# EAGLE board SparkFun GPS RTK Surveyor-Panel (EAGLE 9.6.2), part 1 of 3
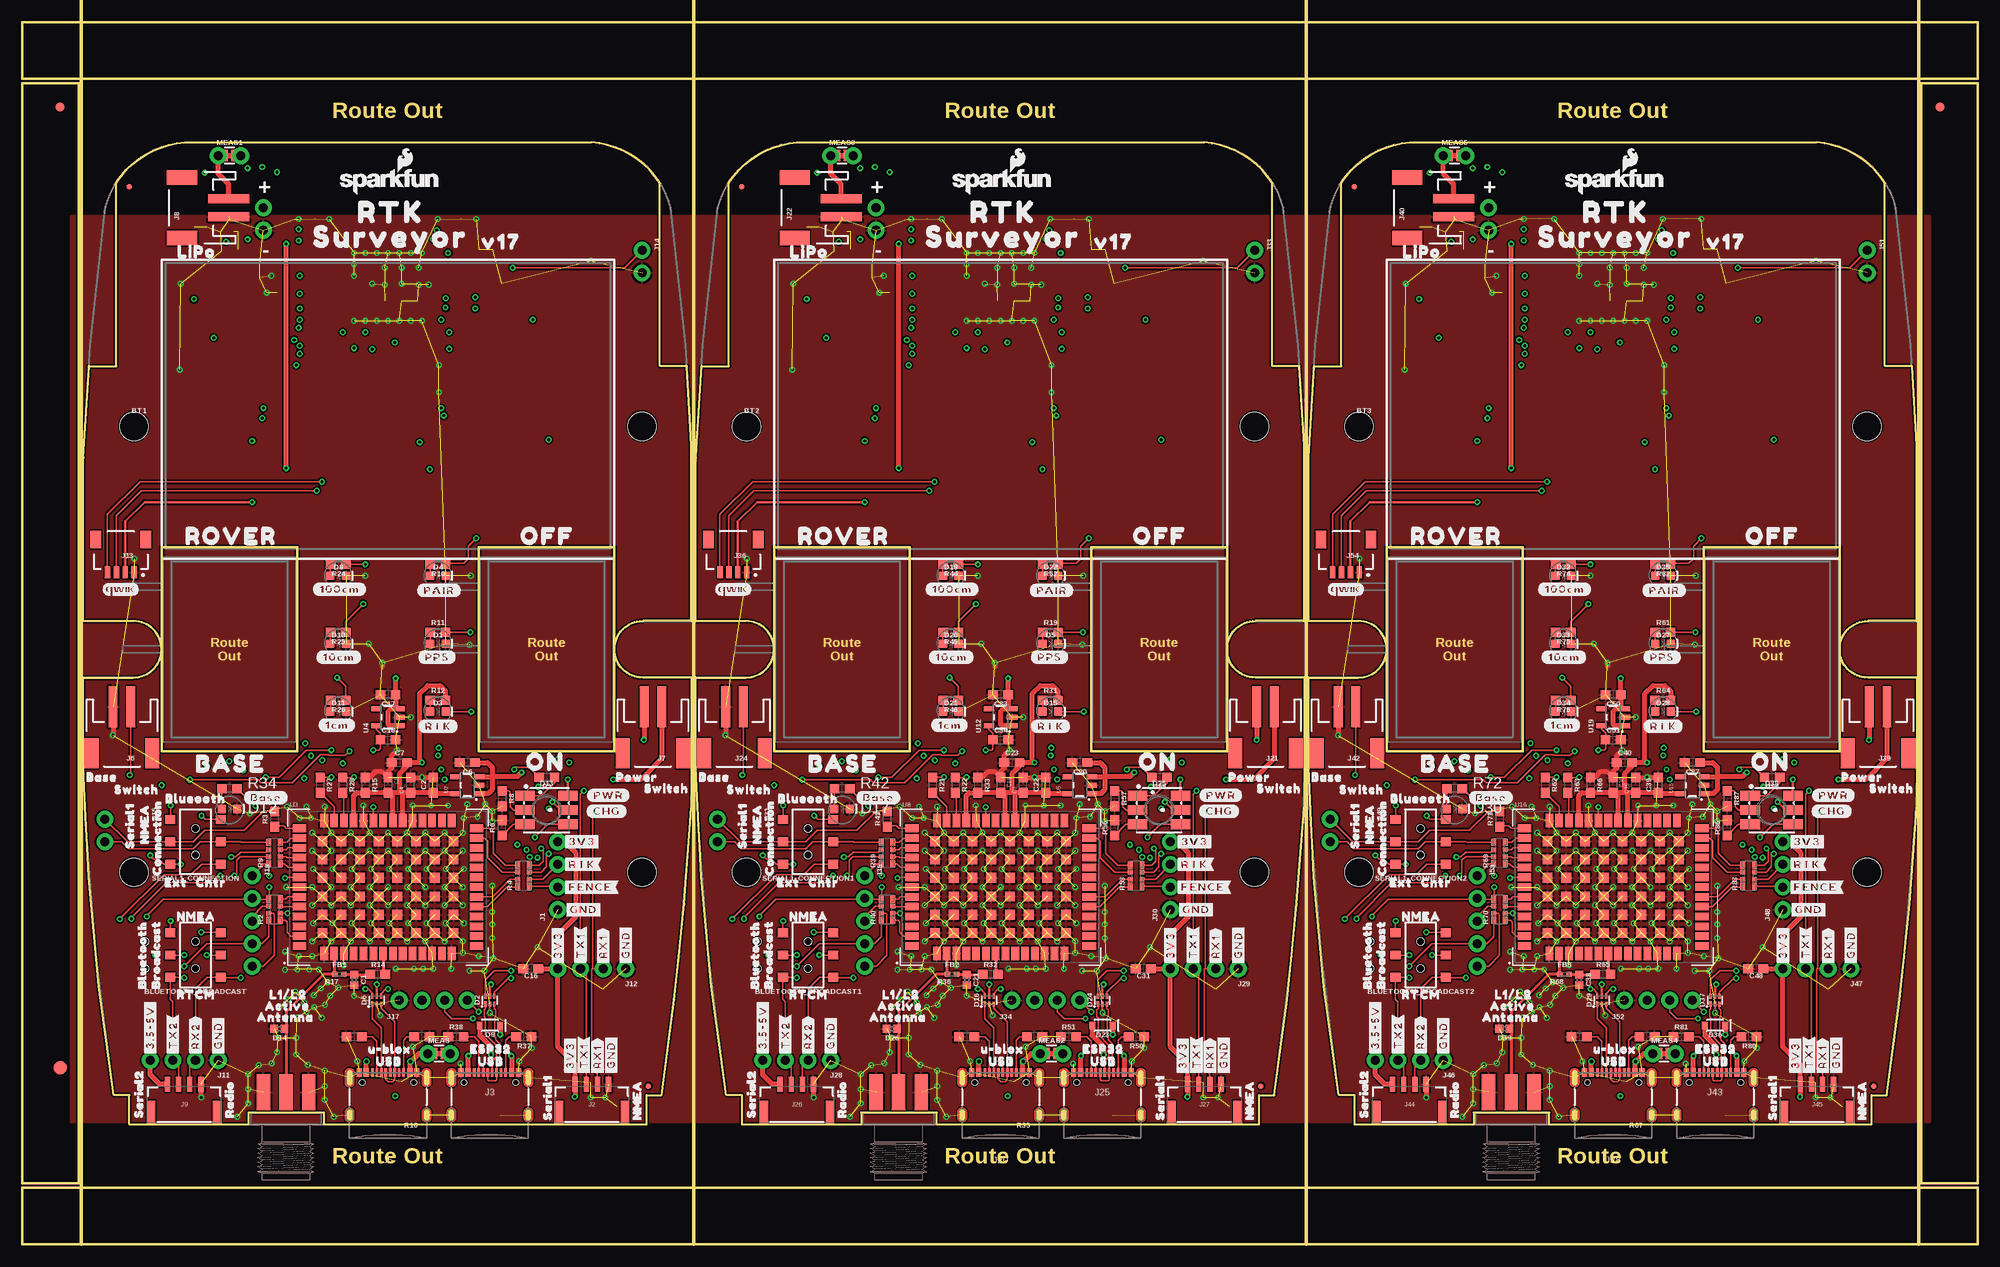
[diagram p0: board, top side]
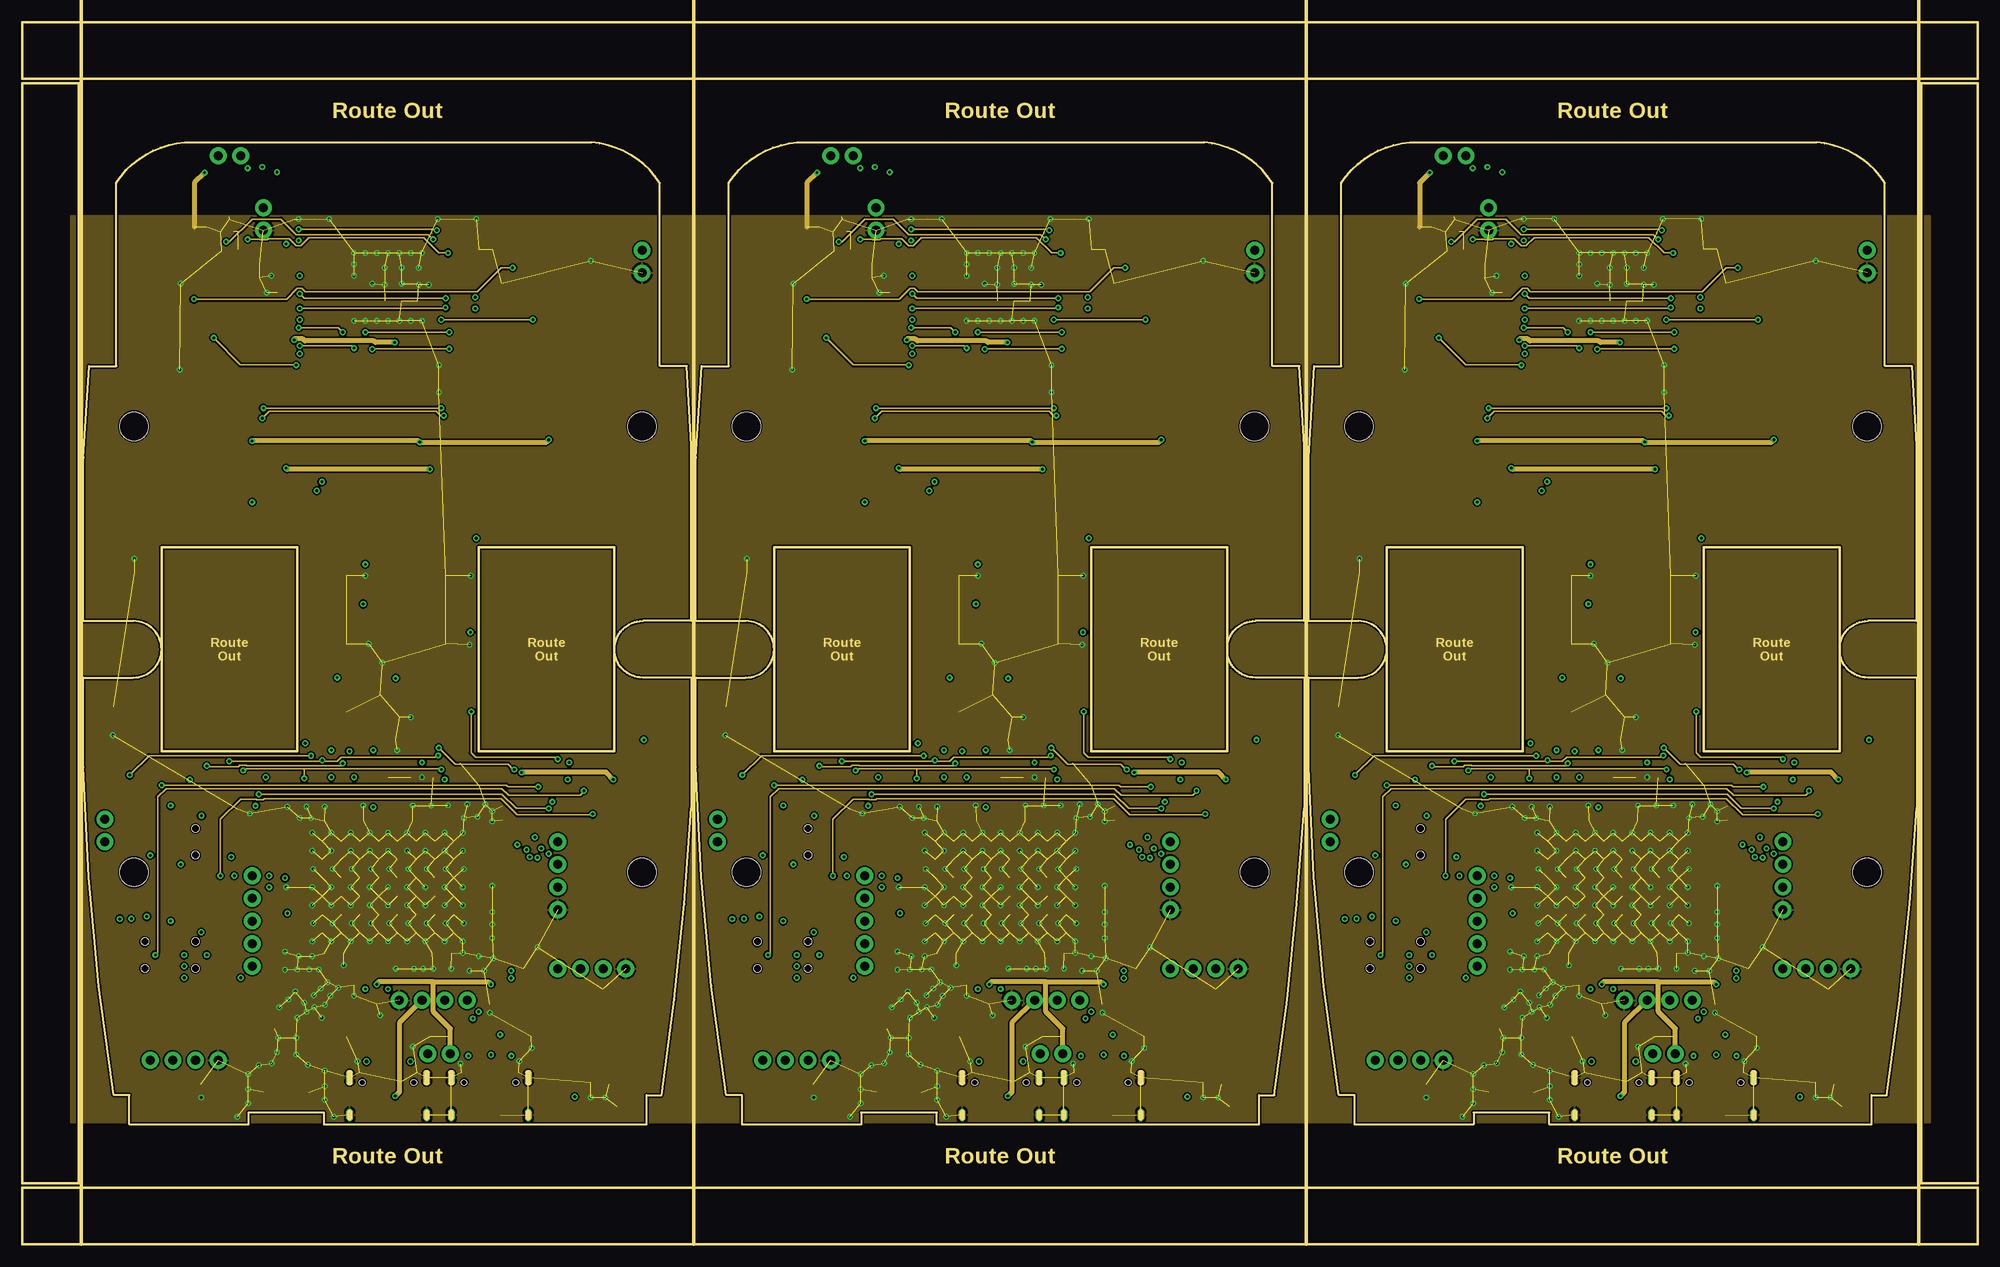
[diagram p1: board, inner layer Route2]
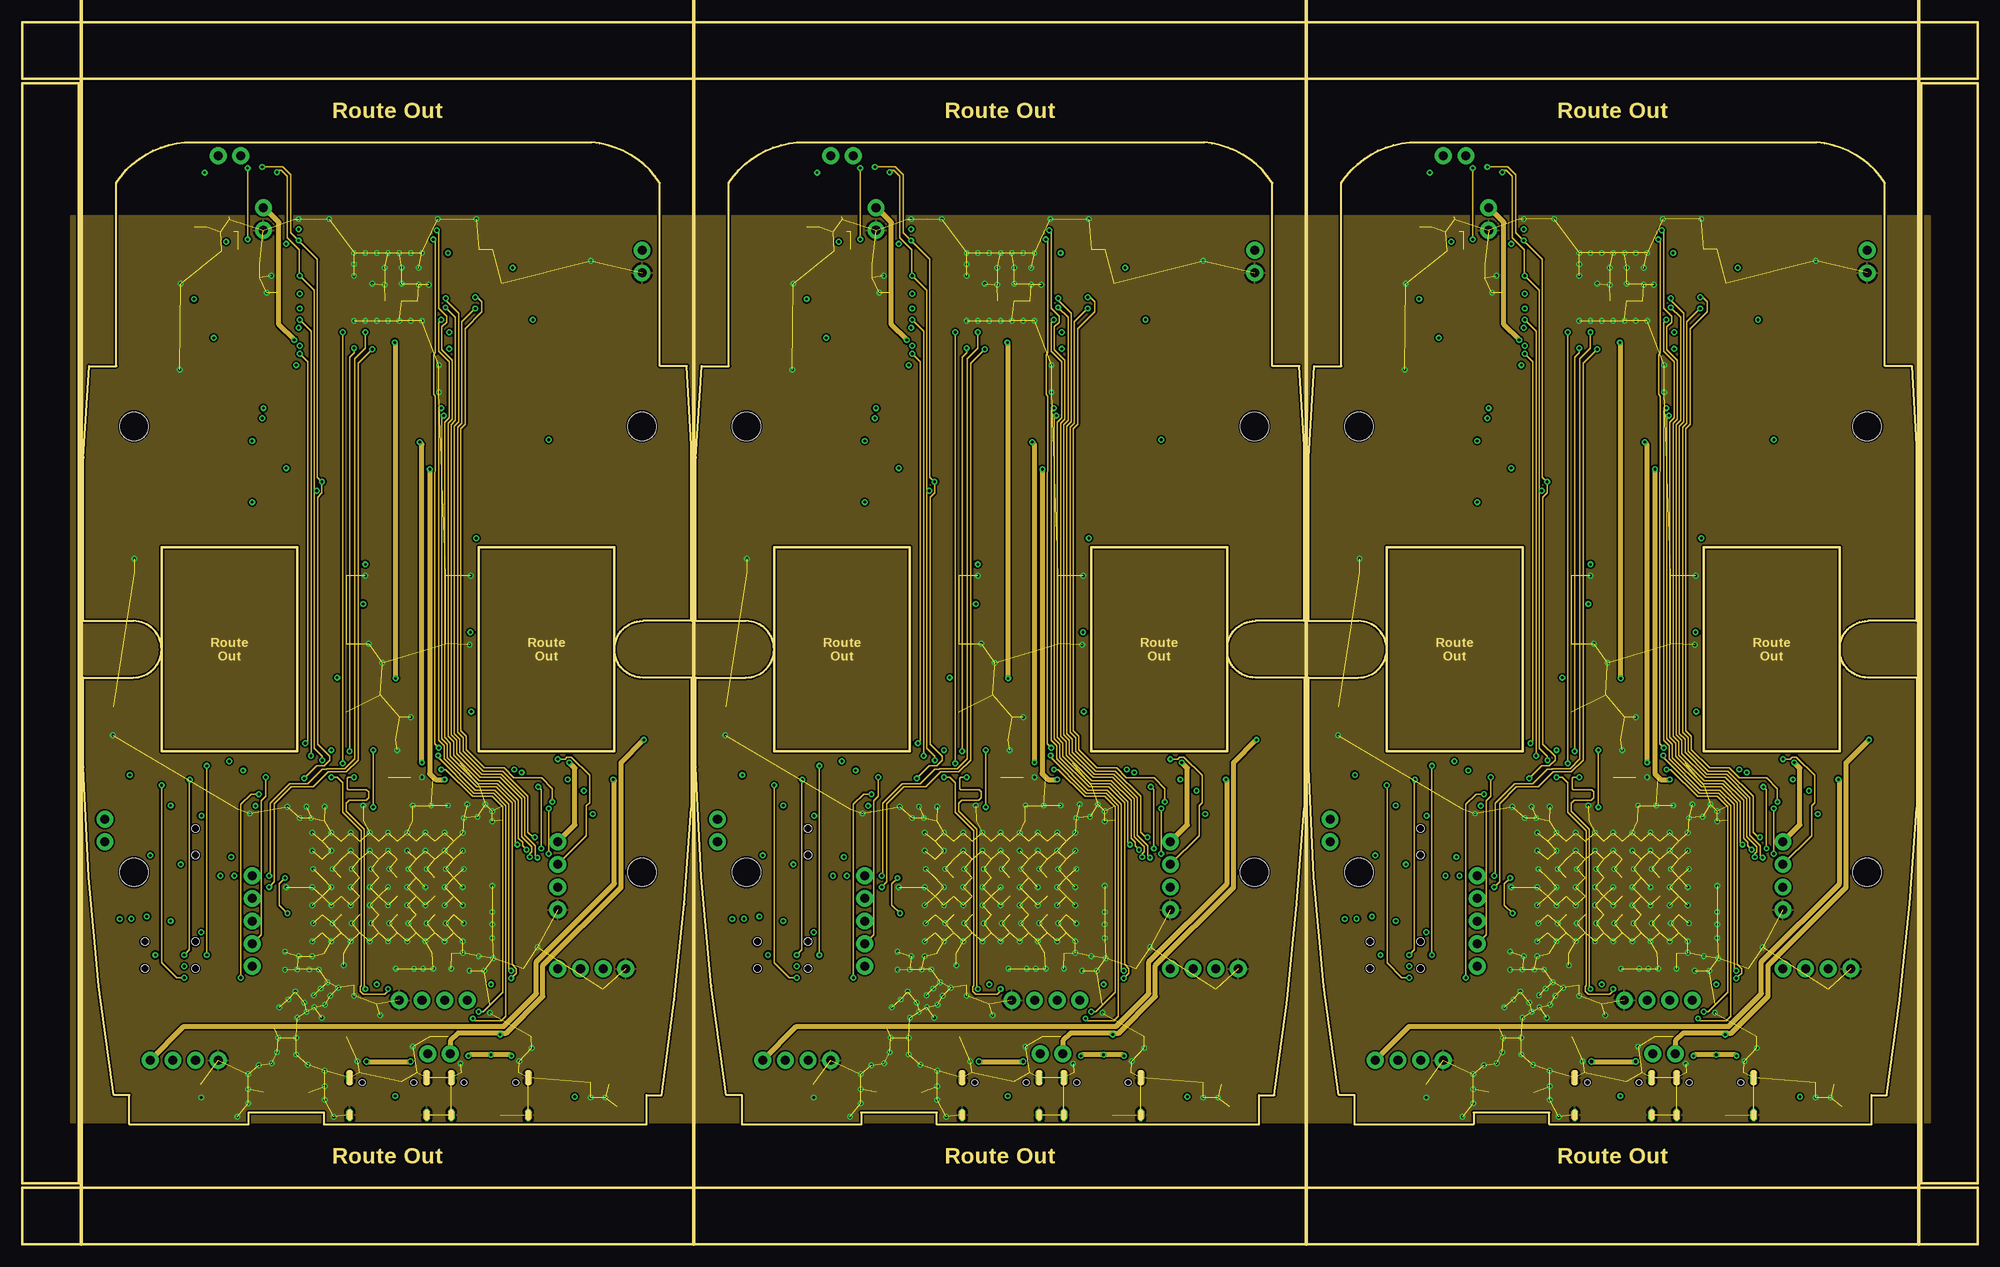
[diagram p2: board, inner layer Route15]
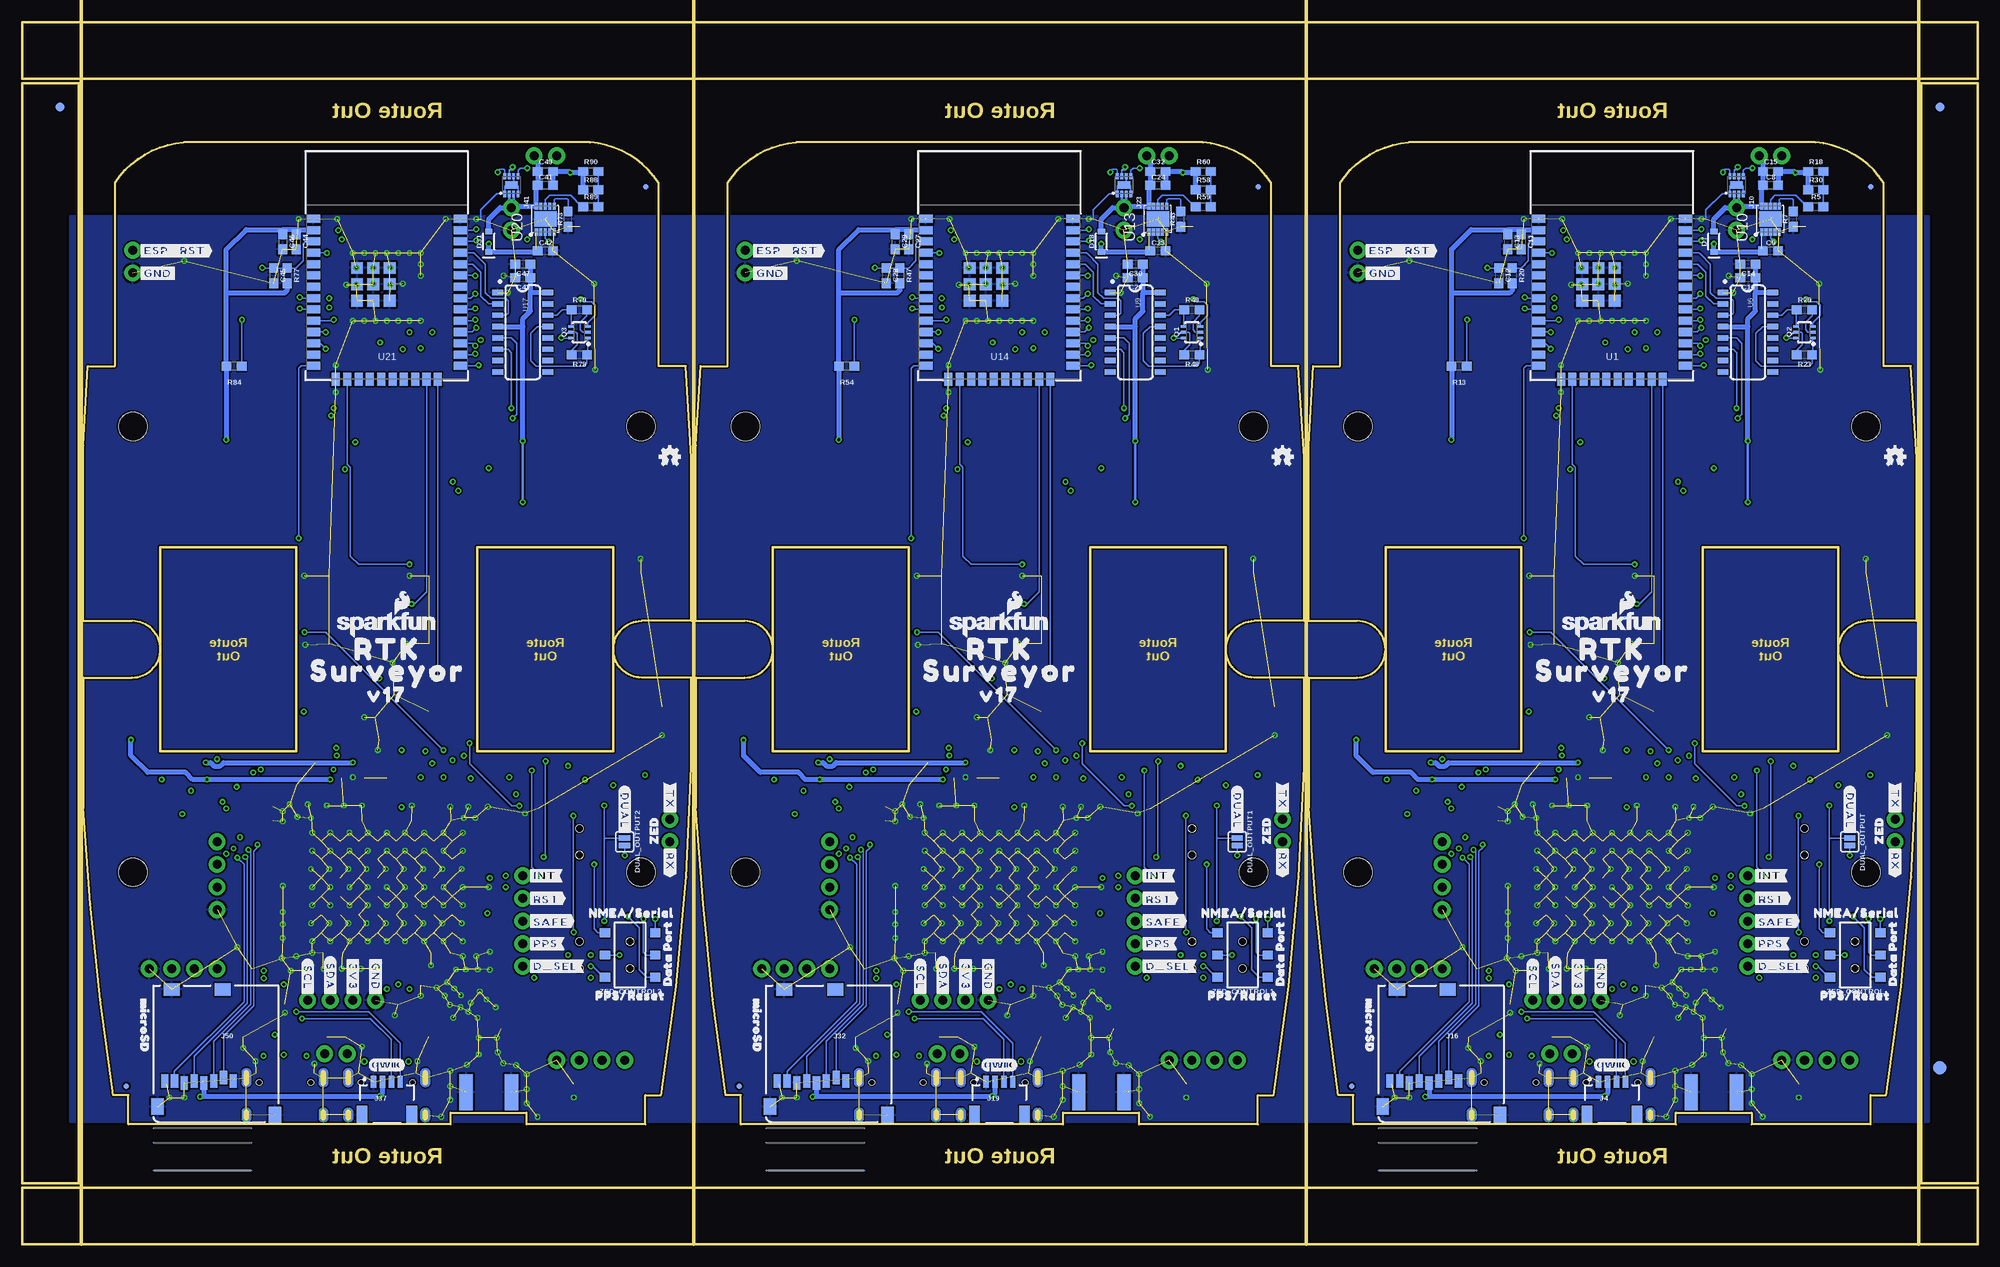
[diagram p3: board, bottom side, seen from below]

Size 219.33 x 137.06 mm. Coordinates in mm from the lower left corner, seen from the top.
Outline: 6.86,88.2 6.86,69.91 12.45,69.91 arc-180 12.45,63.56 6.86,63.56 6.86,53.53 arc8 10.27,16.74 12.02,16.74 12.02,13.46 25.37,13.46 25.37,14.78 33.87,14.78 33.87,13.46 70.02,13.46 70.02,16.74 71.72,16.74 arc5 75.06,48.96 75.06,63.56 69.6,63.56 arc-180 69.6,69.91 75.06,69.91 75.06,89.6 74.55,98.49 71.5,98.49 71.5,119.06 arc52 63.83,123.6 18.21,123.6 arc52 10.54,119.06 10.54,98.49 7.49,98.49 6.86,88.2
Outline: 6.86,88.2 6.86,88.33
Outline: 75.56,88.2 75.56,69.91 81.15,69.91 arc-180 81.15,63.56 75.56,63.56 75.56,53.53 arc8 78.98,16.74 80.73,16.74 80.73,13.46 94.08,13.46 94.08,14.78 102.58,14.78 102.58,13.46 138.73,13.46 138.73,16.74 140.43,16.74 arc5 143.76,48.96 143.76,63.56 138.3,63.56 arc-180 138.3,69.91 143.76,69.91 143.76,89.6 143.26,98.49 140.21,98.49 140.21,119.06 arc52 132.54,123.6 86.92,123.6 arc52 79.25,119.06 79.25,98.49 76.2,98.49 75.56,88.2
Outline: 75.56,88.2 75.56,88.33
Outline: 144.27,88.2 144.27,69.91 149.86,69.91 arc-180 149.86,63.56 144.27,63.56 144.27,53.53 arc8 147.69,16.74 149.44,16.74 149.44,13.46 162.78,13.46 162.78,14.78 171.28,14.78 171.28,13.46 207.44,13.46 207.44,16.74 209.13,16.74 arc5 212.47,48.96 212.47,63.56 207.01,63.56 arc-180 207.01,69.91 212.47,69.91 212.47,89.6 211.96,98.49 208.91,98.49 208.91,119.06 arc52 201.24,123.6 155.63,123.6 arc52 147.96,119.06 147.96,98.49 144.91,98.49 144.27,88.2
Outline: 144.27,88.2 144.27,88.33
Outline: 15.62,78.17 30.86,78.17 30.86,55.31 15.62,55.31 15.62,78.17
Outline: 51.18,78.17 66.42,78.17 66.42,55.31 51.18,55.31 51.18,78.17
Outline: 84.33,78.17 99.57,78.17 99.57,55.31 84.33,55.31 84.33,78.17
Outline: 119.89,78.17 135.13,78.17 135.13,55.31 119.89,55.31 119.89,78.17
Outline: 153.03,78.17 168.28,78.17 168.28,55.31 153.03,55.31 153.03,78.17
Outline: 188.59,78.17 203.84,78.17 203.84,55.31 188.59,55.31 188.59,78.17
Outline: 0,6.35 219.33,6.35 219.33,0 0,0 0,6.35
Outline: 212.98,130.2 219.33,130.2 219.33,6.86 212.98,6.86 212.98,130.2
Outline: 0,137.06 219.33,137.06 219.33,130.71 0,130.71 0,137.06
Outline: 0,130.2 6.35,130.2 6.35,6.86 0,6.86 0,130.2
Copper layers (1*2*15*16): Top 0.035559375mm / dielectric 0.47751875mm / Route2 0.035559375mm / dielectric 0.47751875mm / Route15 0.035559375mm / dielectric 0.47751875mm / Bottom 0.035559375mm
Design rules "SparkFun GPS RTK Surveyor": minimum track width 7mil, minimum drill 12mil, track to track 7mil, track to pad 7mil, pad to pad 7mil, via to via 7mil, smd to smd 7mil, copper to edge 7mil, drill to drill 7mil, minimum pad ring 7mil, minimum via ring 7mil, stop-mask expansion 4mil, vias tented up to drill 25mil, thermal gap 10mil
Net classes: 1 power: width 0.305 mm; 3 RF: width 0.35 mm, clearance 0.203 mm
Milling: 4 lines

## Footprints (pad centres in the part's own frame; a part is rotated, then mirrored left to right if it is on the bottom)
SWITCH_DPDT_SMD_AYZ0202 = smd 1 x 1.15: 1 -2.5,2.825; 2 0,2.825; 3 2.5,2.825; 4 -2.5,-2.825; 5 0,-2.825; 6 2.5,-2.825 | hole 0.85: 1.5,0; -1.5,0
0402 = smd 0.85 x 0.9: 1 -0.58,0; 2 0.58,0
0603 = smd 1.1 x 1: 1 -0.85,0; 2 0.85,0
LED-0603 = smd 1 x 1: A -0.877,0; C 0.877,0
SOT886 = smd 0.61 x 0.25: 1 -0.405,0.5 | smd 0.56 x 0.25: 2 -0.43,0; 3 -0.43,-0.5; 4 0.43,-0.5; 5 0.43,0; 6 0.43,0.5
SOD-323 = smd 0.63 x 0.83: A 1.15,0; C -1.15,0
LED-TRICOLOR-5050 = smd 2.2 x 1.1: 1 -2.4,1.6; 2 -2.4,0; 3 -2.4,-1.6; 4 2.4,-1.6; 5 2.4,0; 6 2.4,1.6
SMT-JUMPER_2_NO_SILK = smd 0.635 x 1.27: 1 -0.406,0; 2 0.406,0
SMA-EDGE = smd 1.5 x 4: GND@0 -2.54,0; GND@1 2.54,0; SIG 0,0 | smd 1.5 x 4 bottom: GND@2 -2.54,0; GND@3 2.54,0
FIDUCIAL-1X2 = smd 1 x 1: 1 0,0
FIDUCIAL-1.5X3 = smd 1.5 x 1.5: 1 0,0
0402-TIGHT = smd 0.6 x 0.6: 1 -0.5,0; 2 0.5,0
1X04_NO_SILK = drill 1.016 pad 1.88: 1 0,0; 2 2.54,0; 3 5.08,0; 4 7.62,0
JST-4-SMD-1.25MM-LOCKING = smd 0.6 x 1.7: 1 -1.875,3.3; 2 -0.625,3.3; 3 0.625,3.3; 4 1.875,3.3 | smd 1 x 2.7: NC1 3.725,0.1; NC2 -3.725,0.1
USB-C-16P_4LAYER-PADS = smd 0.3 x 1: A5 -1.25,-0.34; A6 -0.25,-0.34; A7 0.25,-0.34; A8 1.25,-0.34; B5 1.75,-0.34; B6 0.75,-0.34; B7 -0.75,-0.34; B8 -1.75,-0.34 | smd 0.6 x 1: GND -3.225,-0.34; GND2 3.225,-0.34; VBUS1 -2.45,-0.34; VBUS2 2.45,-0.34 | drill 0.4 pad 0.6 long: SHLD1 -4.318,-0.915; SHLD2 4.318,-0.915; SHLD3 -4.318,-5.095; SHLD4 4.318,-5.095 | hole 0.65: -2.89,-1.445; 2.89,-1.445
JST04_1MM_RA = smd 0.6 x 1.35: 1 -1.5,0; 2 -0.5,0; 3 0.5,0; 4 1.5,0 | smd 1.2 x 2: NC1 2.8,-3.675; NC2 -2.8,-3.675
JST-2-SMD = smd 1 x 4.6: 1 -1,-3.7; 2 1,-3.7 | smd 1.6 x 3.4: NC1 -3.4,1.5; NC2 3.4,1.5
1X02_NO_SILK = drill 1.016 pad 1.88: 1 0,0; 2 2.54,0
MICRO-SD-SOCKET = smd 1.8 x 1.4: CD1 -2.05,0.4; CD2 -7.75,0.4 | smd 0.8 x 1.5: CS/DAT3 -7.84,10.3; DAT1 -1.24,10.7; DAT2 -8.94,10.7; DI/CMD -6.74,10.7; DO/DAT0 -2.34,10.7; GND -3.44,10.9; SCLK -4.54,10.7; VCC -5.64,10.9 | smd 1.4 x 1.9: GND1 -13.6,14.55; GND3 -0.45,13.55
1X05_NO_SILK = drill 1.016 pad 1.88: 1 0,0; 2 2.54,0; 3 5.08,0; 4 7.62,0; 5 10.16,0
FIDUCIAL-MICRO = smd 0.635 x 0.635: 1 0,0
COMBO-JUMPER_2_NC_TRACE = smd 0.635 x 1.27: 1 -0.508,0; 2 0.508,0 | drill 1.016 pad 1.88: 3 -1.27,0; 4 1.27,0
SC70-6 = smd 0.3 x 0.66: 1 -0.65,-0.92; 2 0,-0.92; 3 0.65,-0.92; 4 0.65,0.92; 5 0,0.92; 6 -0.65,0.92
1206_RA = smd 0.8 x 0.55: P1 -1.2,-0.62; P4 1.2,-0.62; P5 1.2,0.68; P8 -1.2,0.68 | smd 0.5 x 0.55: P2 -0.4,-0.62; P3 0.4,-0.62; P6 0.4,0.68; P7 -0.4,0.68
ESP-WROOM-32D-NARROW = smd 0.9 x 1.5: 1 6.43,8.238; 2 5.16,8.238; 3 3.89,8.238; 4 2.62,8.238; 5 1.35,8.238; 6 0.08,8.238; 7 -1.19,8.238; 8 -2.46,8.238; 9 -3.73,8.238; 10 -5,8.238; 11 -6.27,8.238; 12 -7.54,8.238; 13 -8.81,8.238; 14 -10.08,8.238; 25 -10.08,-8.238; 26 -8.81,-8.238; 27 -7.54,-8.238; 28 -6.27,-8.238; 29 -5,-8.238; 30 -3.73,-8.238; 31 -2.46,-8.238; 32 -1.19,-8.238; 33 0.08,-8.238; 34 1.35,-8.238; 35 2.62,-8.238; 36 3.89,-8.238; 37 5.16,-8.238; 38 6.43,-8.238 | smd 1.5 x 0.9: 15 -11.57,5.715; 16 -11.57,4.445; 17 -11.57,3.175; 18 -11.57,1.905; 19 -11.57,0.635; 20 -11.57,-0.635; 21 -11.57,-1.905; 22 -11.57,-3.175; 23 -11.57,-4.445; 24 -11.57,-5.715 | smd 1.33 x 1.33: GND1 -0.912,1.531; GNDT1 -2.751,3.346; GNDT2 -2.761,1.516; GNDT3 -2.751,-0.314; GNDT4 -0.891,-0.324; GNDT5 0.909,-0.314; GNDT6 0.909,1.516; GNDT7 0.909,3.346; GNDT8 -0.921,3.346
SOT23-5 = smd 0.55 x 1.2: 1 -0.95,-1.3; 2 0,-1.3; 3 0.95,-1.3; 4 0.95,1.3; 5 -0.95,1.3
ZED-F9P = smd 0.85 x 1.52: 1 -7.15,-7.45; 2 -6.05,-7.45; 3 -4.95,-7.45; 4 -3.85,-7.45; 5 -2.75,-7.45; 6 -1.65,-7.45; 7 -0.55,-7.45; 8 0.55,-7.45; 9 1.65,-7.45; 10 2.75,-7.45; 11 3.85,-7.45; 12 4.95,-7.45; 13 6.05,-7.45; 14 7.15,-7.45; 28 7.15,7.45; 29 6.05,7.45; 30 4.95,7.45; 31 3.85,7.45; 32 2.75,7.45; 33 1.65,7.45; 34 0.55,7.45; 35 -0.55,7.45; 36 -1.65,7.45; 37 -2.75,7.45; 38 -3.85,7.45; 39 -4.95,7.45; 40 -6.05,7.45; 41 -7.15,7.45 | smd 1.52 x 0.85: 15 9.95,-6.6; 16 9.95,-5.5; 17 9.95,-4.4; 18 9.95,-3.3; 19 9.95,-2.2; 20 9.95,-1.1; 21 9.95,0; 22 9.95,1.1; 23 9.95,2.2; 24 9.95,3.3; 25 9.95,4.4; 26 9.95,5.5; 27 9.95,6.6; 42 -9.95,6.6; 43 -9.95,5.5; 44 -9.95,4.4; 45 -9.95,3.3; 46 -9.95,2.2; 47 -9.95,1.1; 48 -9.95,0; 49 -9.95,-1.1; 50 -9.95,-2.2; 51 -9.95,-3.3; 52 -9.95,-4.4; 53 -9.95,-5.5; 54 -9.95,-6.6 | smd 1.1 x 1.1: 55 -1.05,-1.05; 56 -3.15,-1.05; 57 -5.25,-1.05; 58 -7.35,-1.05; 59 -1.05,-3.1; 60 -3.15,-3.1; 61 -5.25,-3.1; 62 -7.35,-3.1; 63 -1.05,-5.15; 64 -3.15,-5.15; 65 -5.25,-5.15; 66 -7.35,-5.15; 67 -1.05,5.15; 68 -3.15,5.15; 69 -5.25,5.15; 70 -7.35,5.15; 71 -1.05,3.1; 72 -3.15,3.1; 73 -5.25,3.1; 74 -7.35,3.1; 75 -1.05,1.05; 76 -3.15,1.05; 77 -5.25,1.05; 78 -7.35,1.05; 79 1.05,1.05; 80 3.15,1.05; 81 5.25,1.05; 82 7.35,1.05; 83 1.05,3.1; 84 3.15,3.1; 85 5.25,3.1; 86 7.35,3.1; 87 1.05,5.15; 88 3.15,5.15; 89 5.25,5.15; 90 7.35,5.15; 91 1.05,-5.15; 92 3.15,-5.15; 93 5.25,-5.15; 94 7.35,-5.15; 95 1.05,-3.1; 96 3.15,-3.1; 97 5.25,-3.1; 98 7.35,-3.1; 99 1.05,-1.05; 100 3.15,-1.05; 101 5.25,-1.05; 102 7.35,-1.05
SO016 = smd 0.6 x 1.2: 1 -4.445,-2.8; 2 -3.175,-2.8; 3 -1.905,-2.8; 4 -0.635,-2.8; 5 0.635,-2.8; 6 1.905,-2.8; 7 3.175,-2.8; 8 4.445,-2.8; 9 4.445,2.8; 10 3.175,2.8; 11 1.905,2.8; 12 0.635,2.8; 13 -0.635,2.8; 14 -1.905,2.8; 15 -3.175,2.8; 16 -4.445,2.8
DFN-8 = smd 0.3 x 0.7: 1 -0.75,-0.99; 2 -0.25,-0.99; 3 0.25,-0.99; 4 0.75,-0.99; 5 0.75,0.99; 6 0.25,0.99; 7 -0.25,0.99; 8 -0.75,0.99 | smd 1.38 x 0.8: 9 0,0
DFN-10 = smd 0.8 x 0.35: 1 -1.45,1; 2 -1.45,0.5; 3 -1.45,0; 4 -1.45,-0.5; 5 -1.45,-1; 6 1.45,-1; 7 1.45,-0.5; 8 1.45,0; 9 1.45,0.5; 10 1.45,1 | smd 1.7 x 2.5: 11 0,0
1553DBK-ENCLOSURE = hole 3.2: -25.006,28.499; 25.006,28.499; 25.006,-28.499; -25.006,-28.499

## Placement (x,y rotation side)
BLUETOOTH_BROADCAST  [SWITCH_DPDT_SMD_AYZ0202]  19.43,32.45 90 top
BLUETOOTH_BROADCAST1  [SWITCH_DPDT_SMD_AYZ0202]  88.14,32.45 90 top
BLUETOOTH_BROADCAST2  [SWITCH_DPDT_SMD_AYZ0202]  156.84,32.45 90 top
BT1  LIPO-OUTLINE1000  [LIPO-1000]  41.02,94.04 90 top
BT2  LIPO-OUTLINE1000  [LIPO-1000]  109.73,94.04 90 top
BT3  LIPO-OUTLINE1000  [LIPO-1000]  178.44,94.04 90 top
C1  47pF  [0402]  37.21,29.65 270 top
C2  1.0uF  [0603]  46.1,51.5 90 top
C3  1.0uF  [0603]  112.27,51.5 90 top
C4  1.0uF  [0603]  43.56,51.5 90 top
C5  0.1uF  [0603]  41.02,51.5 270 top
C6  1.0uF  [0603]  49.91,54.04 180 top
C7  0.1uF  [0603]  42.29,54.04 0 top
C8  4.7uF  [0603]  23.24,118.81 0 bottom
C9  4.7uF  [0603]  23.24,111.44 0 bottom
C10  10uF  [0603]  25.78,108.39 180 bottom
C11  0.1uF  [0603]  51.18,112.46 270 bottom
C12  0.1uF  [0603]  53.72,108.65 270 bottom
C13  0.1uF  [0603]  52.7,112.46 270 bottom
C14  10uF  [0603]  25.78,109.92 180 bottom
C15  0.1uF  [0603]  23.24,120.33 0 bottom
C16  0.1uF  [0603]  57.02,30.91 180 top
C17  1.0uF  [0603]  41.02,61.66 180 top
C18  1.0uF  [0603]  41.02,56.58 0 top
C19  0.1uF  [0603]  109.73,51.5 270 top
C20  1.0uF  [0603]  118.62,54.04 180 top
C21  47pF  [0402]  105.92,29.65 270 top
C22  1.0uF  [0603]  114.81,51.5 90 top
C23  0.1uF  [0603]  111,54.04 0 top
C24  4.7uF  [0603]  91.95,118.81 0 bottom
C25  4.7uF  [0603]  91.95,111.44 0 bottom
C26  10uF  [0603]  94.49,108.39 180 bottom
C27  0.1uF  [0603]  119.89,112.46 270 bottom
C28  0.1uF  [0603]  122.43,108.65 270 bottom
C29  0.1uF  [0603]  121.41,112.46 270 bottom
C30  10uF  [0603]  94.49,109.92 180 bottom
C31  0.1uF  [0603]  125.73,30.91 180 top
C32  0.1uF  [0603]  91.95,120.33 0 bottom
C33  1.0uF  [0603]  109.73,61.66 180 top
C34  1.0uF  [0603]  109.73,56.58 0 top
C35  1.0uF  [0603]  180.97,51.5 90 top
C36  0.1uF  [0603]  178.44,51.5 270 top
C37  1.0uF  [0603]  187.33,54.04 180 top
C38  47pF  [0402]  174.62,29.65 270 top
C39  1.0uF  [0603]  183.52,51.5 90 top
C40  0.1uF  [0603]  179.71,54.04 0 top
C41  4.7uF  [0603]  160.66,118.81 0 bottom
C42  4.7uF  [0603]  160.66,111.44 0 bottom
C43  10uF  [0603]  163.19,108.39 180 bottom
C44  0.1uF  [0603]  188.59,112.46 270 bottom
C45  0.1uF  [0603]  191.13,108.65 270 bottom
C46  0.1uF  [0603]  190.12,112.46 270 bottom
C47  10uF  [0603]  163.19,109.92 180 bottom
C48  0.1uF  [0603]  194.44,30.91 180 top
C49  0.1uF  [0603]  160.66,120.33 0 bottom
C50  1.0uF  [0603]  178.44,61.66 180 top
C51  1.0uF  [0603]  178.44,56.58 0 top
D1  Yellow  [LED-0603]  46.61,67.37 0 top
D2  PRTR5V0U2F  [SOT886]  52.45,27.37 90 top
D3  WHITE  [LED-0603]  46.61,59.75 0 top
D4  BLUE  [LED-0603]  46.61,74.99 0 top
D5  Yellow  [LED-0603]  115.32,67.37 0 top
D6  PRTR5V0U2F  [SOT886]  39.75,27.37 90 top
D7  3A/10V/280mV  [SOD-323]  29.59,112.46 90 bottom
D8  GREEN  [LED-0603]  35.43,74.99 0 top
D9  3A/10V/280mV  [SOD-323]  52.45,24.56 180 top
D10  GREEN  [LED-0603]  35.43,67.37 0 top
D11  GREEN  [LED-0603]  35.43,59.75 0 top
D12  RED  [LED-0603]  23.24,48.83 0 top
D13  [LED-TRICOLOR-5050]  58.8,48.7 0 top
D14  PESD0402  [0402]  28.83,24.19 180 top
D15  WHITE  [LED-0603]  115.32,59.75 0 top
D16  PRTR5V0U2F  [SOT886]  108.46,27.37 90 top
D17  RED  [LED-0603]  91.95,48.83 0 top
D18  3A/10V/280mV  [SOD-323]  98.3,112.46 90 bottom
D19  GREEN  [LED-0603]  104.14,74.99 0 top
D20  GREEN  [LED-0603]  104.14,67.37 0 top
D21  GREEN  [LED-0603]  104.14,59.75 0 top
D22  BLUE  [LED-0603]  115.32,74.99 0 top
D23  3A/10V/280mV  [SOD-323]  121.16,24.56 180 top
D24  PRTR5V0U2F  [SOT886]  121.16,27.37 90 top
D25  [LED-TRICOLOR-5050]  127.51,48.7 0 top
D26  PESD0402  [0402]  97.54,24.19 180 top
D27  Yellow  [LED-0603]  184.02,67.37 0 top
D28  WHITE  [LED-0603]  184.02,59.75 0 top
D29  PRTR5V0U2F  [SOT886]  177.16,27.37 90 top
D30  RED  [LED-0603]  160.66,48.83 0 top
D31  3A/10V/280mV  [SOD-323]  167,112.46 90 bottom
D32  GREEN  [LED-0603]  172.85,74.99 0 top
D33  GREEN  [LED-0603]  172.85,67.37 0 top
D34  GREEN  [LED-0603]  172.85,59.75 0 top
D35  BLUE  [LED-0603]  184.02,74.99 0 top
D36  3A/10V/280mV  [SOD-323]  189.87,24.56 180 top
D37  PRTR5V0U2F  [SOT886]  189.87,27.37 90 top
D38  [LED-TRICOLOR-5050]  196.22,48.7 0 top
D39  PESD0402  [0402]  166.24,24.19 180 top
DUAL_OUTPUT  [SMT-JUMPER_2_NO_SILK]  14.35,45.15 270 bottom
DUAL_OUTPUT1  [SMT-JUMPER_2_NO_SILK]  83.06,45.15 270 bottom
DUAL_OUTPUT2  [SMT-JUMPER_2_NO_SILK]  151.77,45.15 270 bottom
E1  SMA  [SMA-EDGE]  29.59,17.05 180 top
E2  SMA  [SMA-EDGE]  98.3,17.05 180 top
E3  SMA  [SMA-EDGE]  167,17.05 180 top
E$1  [FIDUCIAL-1X2]  4.23,127.54 0 top
E$2  [FIDUCIAL-1X2]  4.23,127.54 0 bottom
E$3  [FIDUCIAL-1X2]  215.09,127.54 0 top
E$4  [FIDUCIAL-1X2]  215.09,127.54 0 bottom
E$5  [FIDUCIAL-1.5X3]  4.23,19.81 0 top
E$6  [FIDUCIAL-1.5X3]  4.23,19.81 0 bottom
FB1  2.66Ω  [0402-TIGHT]  35.56,30.29 0 top
FB2  2.66Ω  [0402-TIGHT]  104.27,30.29 0 top
FB3  2.66Ω  [0402-TIGHT]  172.97,30.29 0 top
J1  [1X04_NO_SILK]  60.07,37.53 90 top
J2  [JST-4-SMD-1.25MM-LOCKING]  63.88,14.65 0 top
J3  USB Female Type C Connector  [USB-C-16P_4LAYER-PADS]  52.45,19.6 0 top
J4  External  [JST04_1MM_RA]  41.02,18.21 0 bottom
J5  USB Female Type C Connector  [USB-C-16P_4LAYER-PADS]  41.02,19.6 0 top
J6  Start Base  [JST-2-SMD]  11.18,56.58 180 top
J7  Power Switch  [JST-2-SMD]  70.74,56.58 180 top
J8  [JST-2-SMD]  19.43,116.27 90 top
J9  [JST-4-SMD-1.25MM-LOCKING]  18.16,14.65 0 top
J10  [1X02_NO_SILK]  27.05,116.27 270 bottom
J11  [1X04_NO_SILK]  21.97,20.65 180 top
J12  [1X04_NO_SILK]  67.69,30.91 180 top
J13  Internal  [JST04_1MM_RA]  11.05,75.37 180 top
J14  [1X02_NO_SILK]  69.52,111.5 270 top
J15  [1X02_NO_SILK]  9.27,47.69 270 top
J16  microSD  [MICRO-SD-SOCKET]  67.18,29 180 bottom
J17  Qwiic Right Angle  [1X04_NO_SILK]  42.29,27.37 0 top
J18  [1X05_NO_SILK]  25.78,41.34 270 top
J19  External  [JST04_1MM_RA]  109.73,18.21 0 bottom
J20  USB Female Type C Connector  [USB-C-16P_4LAYER-PADS]  109.73,19.6 0 top
J21  Power Switch  [JST-2-SMD]  139.45,56.58 180 top
J22  [JST-2-SMD]  88.14,116.27 90 top
J23  [1X02_NO_SILK]  95.76,116.27 270 bottom
J24  Start Base  [JST-2-SMD]  79.88,56.58 180 top
J25  USB Female Type C Connector  [USB-C-16P_4LAYER-PADS]  121.16,19.6 0 top
J26  [JST-4-SMD-1.25MM-LOCKING]  86.87,14.65 0 top
J27  [JST-4-SMD-1.25MM-LOCKING]  132.59,14.65 0 top
J28  [1X04_NO_SILK]  90.68,20.65 180 top
J29  [1X04_NO_SILK]  136.4,30.91 180 top
J30  [1X04_NO_SILK]  128.78,37.53 90 top
J31  [1X02_NO_SILK]  77.98,47.69 270 top
J32  microSD  [MICRO-SD-SOCKET]  135.89,29 180 bottom
J33  [1X02_NO_SILK]  138.23,111.5 270 top
J34  Qwiic Right Angle  [1X04_NO_SILK]  111,27.37 0 top
J35  [1X05_NO_SILK]  94.49,41.34 270 top
J36  Internal  [JST04_1MM_RA]  79.76,75.37 180 top
J37  External  [JST04_1MM_RA]  178.44,18.21 0 bottom
J38  USB Female Type C Connector  [USB-C-16P_4LAYER-PADS]  178.44,19.6 0 top
J39  Power Switch  [JST-2-SMD]  208.15,56.58 180 top
J40  [JST-2-SMD]  156.84,116.27 90 top
J41  [1X02_NO_SILK]  164.47,116.27 270 bottom
J42  Start Base  [JST-2-SMD]  148.59,56.58 180 top
J43  USB Female Type C Connector  [USB-C-16P_4LAYER-PADS]  189.87,19.6 0 top
J44  [JST-4-SMD-1.25MM-LOCKING]  155.58,14.65 0 top
J45  [JST-4-SMD-1.25MM-LOCKING]  201.3,14.65 0 top
J46  [1X04_NO_SILK]  159.38,20.65 180 top
J47  [1X04_NO_SILK]  205.11,30.91 180 top
J48  [1X04_NO_SILK]  197.49,37.53 90 top
J49  [1X02_NO_SILK]  146.69,47.69 270 top
J50  microSD  [MICRO-SD-SOCKET]  204.6,29 180 bottom
J51  [1X02_NO_SILK]  206.94,111.5 270 top
J52  Qwiic Right Angle  [1X04_NO_SILK]  179.71,27.37 0 top
J53  [1X05_NO_SILK]  163.19,41.34 270 top
J54  Internal  [JST04_1MM_RA]  148.46,75.37 180 top
JP1  FIDUCIALUFIDUCIAL  [FIDUCIAL-MICRO]  138.94,17.75 0 top
JP2  FIDUCIALUFIDUCIAL  [FIDUCIAL-MICRO]  80.7,118.63 0 top
JP3  FIDUCIALUFIDUCIAL  [FIDUCIAL-MICRO]  138.94,17.75 0 bottom
JP4  FIDUCIALUFIDUCIAL  [FIDUCIAL-MICRO]  80.7,118.63 0 bottom
JP5  FIDUCIALUFIDUCIAL  [FIDUCIAL-MICRO]  207.65,17.75 0 top
JP6  FIDUCIALUFIDUCIAL  [FIDUCIAL-MICRO]  149.41,118.63 0 top
JP7  FIDUCIALUFIDUCIAL  [FIDUCIAL-MICRO]  207.65,17.75 0 bottom
JP8  FIDUCIALUFIDUCIAL  [FIDUCIAL-MICRO]  149.41,118.63 0 bottom
JP21  FIDUCIALUFIDUCIAL  [FIDUCIAL-MICRO]  70.23,17.75 0 top
JP61  FIDUCIALUFIDUCIAL  [FIDUCIAL-MICRO]  11.99,118.63 0 top
JP71  FIDUCIALUFIDUCIAL  [FIDUCIAL-MICRO]  70.23,17.75 0 bottom
JP81  FIDUCIALUFIDUCIAL  [FIDUCIAL-MICRO]  11.99,118.63 0 bottom
LOGO1  OSHW-LOGOMINI  [OSHW-LOGO-MINI]  9.27,88.33 0 bottom
LOGO2  SFE_LOGO_NAME_FLAME.1_INCH  [SFE_LOGO_NAME_FLAME_.1]  41.02,69.53 0 bottom
LOGO3  SFE_LOGO_NAME_FLAME.1_INCH  [SFE_LOGO_NAME_FLAME_.1]  41.22,119.2 0 top
LOGO4  OSHW-LOGOMINI  [OSHW-LOGO-MINI]  77.98,88.33 0 bottom
LOGO5  SFE_LOGO_NAME_FLAME.1_INCH  [SFE_LOGO_NAME_FLAME_.1]  109.73,69.53 0 bottom
LOGO6  SFE_LOGO_NAME_FLAME.1_INCH  [SFE_LOGO_NAME_FLAME_.1]  109.93,119.2 0 top
LOGO7  OSHW-LOGOMINI  [OSHW-LOGO-MINI]  146.69,88.33 0 bottom
LOGO8  SFE_LOGO_NAME_FLAME.1_INCH  [SFE_LOGO_NAME_FLAME_.1]  178.44,69.53 0 bottom
LOGO9  SFE_LOGO_NAME_FLAME.1_INCH  [SFE_LOGO_NAME_FLAME_.1]  178.63,119.2 0 top
MEAS  [COMBO-JUMPER_2_NC_TRACE]  46.74,21.38 0 top
MEAS1  [COMBO-JUMPER_2_NC_TRACE]  23.24,122.11 0 top
MEAS2  [COMBO-JUMPER_2_NC_TRACE]  115.44,21.38 0 top
MEAS3  [COMBO-JUMPER_2_NC_TRACE]  91.95,122.11 0 top
MEAS4  [COMBO-JUMPER_2_NC_TRACE]  184.15,21.38 0 top
MEAS5  [COMBO-JUMPER_2_NC_TRACE]  160.66,122.11 0 top
Q1  MBT3904DW1T1  [SC70-6]  88.14,102.3 90 bottom
Q2  MBT3904DW1T1  [SC70-6]  19.43,102.3 90 bottom
Q3  MBT3904DW1T1  [SC70-6]  156.84,102.3 90 bottom
R1  4.7k  [0603]  58.85,52.37 180 top
R2  33  [1206_RA]  28.32,37.53 90 top
R3  33  [0603]  28.32,47.69 90 top
R4  33  [1206_RA]  56.26,41.34 90 top
R5  0  [0603]  18.16,116.39 0 bottom
R6  1k  [0603]  53.82,46.7 90 top
R7  1k  [0603]  20.7,115 90 bottom
R8  1k  [0603]  53.82,50 270 top
R9  33  [1206_RA]  28.32,43.88 90 top
R10  330  [0603]  46.61,76.26 180 top
R11  20  [0603]  46.61,68.64 0 top
R12  330  [0603]  46.61,61.02 0 top
R13  100k  [0603]  58.17,98.49 180 bottom
R14  10  [0603]  39.88,30.29 0 top
R15  100k  [0603]  38.48,51.5 270 top
R16  5.1k  [0603]  44.83,23.29 180 top
R17  5.1k  [0603]  37.21,23.29 0 top
R18  10k  [0603]  18.16,120.33 0 bottom
R19  20  [0603]  115.32,68.64 0 top
R20  10k  [0603]  52.2,108.65 270 bottom
R21  27  [0603]  102.11,51.5 270 top
R22  27  [0603]  104.65,51.5 270 top
R23  10k  [0603]  19.43,99.76 180 bottom
R24  20  [0603]  35.43,76.26 180 top
R25  20  [0603]  35.43,68.64 180 top
R26  20  [0603]  35.43,61.02 180 top
R27  27  [0603]  33.4,51.5 270 top
R28  27  [0603]  35.94,51.5 270 top
R29  10k  [0603]  19.43,104.84 0 bottom
R30  150k  [0603]  18.16,118.3 0 bottom
R31  330  [0603]  115.32,61.02 0 top
R32  10  [0603]  108.59,30.29 0 top
R33  100k  [0603]  107.19,51.5 270 top
R34  330  [0603]  23.24,51.11 180 top
R35  5.1k  [0603]  113.54,23.29 180 top
R36  5.1k  [0603]  105.92,23.29 0 top
R37  5.1k  [0603]  56.26,23.29 180 top
R38  5.1k  [0603]  48.64,23.29 0 top
R39  33  [1206_RA]  97.03,43.88 90 top
R40  33  [1206_RA]  97.03,37.53 90 top
R41  33  [0603]  97.03,47.69 90 top
R42  330  [0603]  91.95,51.11 180 top
R43  1k  [0603]  89.41,115 90 bottom
R44  20  [0603]  104.14,76.26 180 top
R45  20  [0603]  104.14,68.64 180 top
R46  20  [0603]  104.14,61.02 180 top
R47  10k  [0603]  120.9,108.65 270 bottom
R48  10k  [0603]  88.14,99.76 180 bottom
R49  10k  [0603]  88.14,104.84 0 bottom
R50  5.1k  [0603]  124.97,23.29 180 top
R51  5.1k  [0603]  117.35,23.29 0 top
R52  330  [0603]  115.32,76.26 180 top
R53  33  [1206_RA]  124.97,41.34 90 top
R54  100k  [0603]  126.87,98.49 180 bottom
R55  4.7k  [0603]  127.55,52.37 180 top
R56  1k  [0603]  122.53,46.7 90 top
R57  1k  [0603]  122.53,50 270 top
R58  150k  [0603]  86.87,118.3 0 bottom
R59  0  [0603]  86.87,116.39 0 bottom
R60  10k  [0603]  86.87,120.33 0 bottom
R61  20  [0603]  184.02,68.64 0 top
R62  27  [0603]  170.81,51.5 270 top
R63  27  [0603]  173.36,51.5 270 top
R64  330  [0603]  184.02,61.02 0 top
R65  10  [0603]  177.29,30.29 0 top
R66  100k  [0603]  175.9,51.5 270 top
R67  5.1k  [0603]  182.25,23.29 180 top
R68  5.1k  [0603]  174.62,23.29 0 top
R69  33  [1206_RA]  165.74,43.88 90 top
R70  33  [1206_RA]  165.74,37.53 90 top
R71  33  [0603]  165.74,47.69 90 top
R72  330  [0603]  160.66,51.11 180 top
R73  1k  [0603]  158.12,115 90 bottom
R74  20  [0603]  172.85,76.26 180 top
R75  20  [0603]  172.85,68.64 180 top
R76  20  [0603]  172.85,61.02 180 top
R77  10k  [0603]  189.61,108.65 270 bottom
R78  10k  [0603]  156.84,99.76 180 bottom
R79  10k  [0603]  156.84,104.84 0 bottom
R80  5.1k  [0603]  193.68,23.29 180 top
R81  5.1k  [0603]  186.06,23.29 0 top
R82  330  [0603]  184.02,76.26 180 top
R83  33  [1206_RA]  193.68,41.34 90 top
R84  100k  [0603]  195.58,98.49 180 bottom
R85  4.7k  [0603]  196.26,52.37 180 top
R86  1k  [0603]  191.24,46.7 90 top
R87  1k  [0603]  191.24,50 270 top
R88  150k  [0603]  155.58,118.3 0 bottom
R89  0  [0603]  155.58,116.39 0 bottom
R90  10k  [0603]  155.58,120.33 0 bottom
SERIAL1_CONNECTION  [SWITCH_DPDT_SMD_AYZ0202]  19.43,45.15 90 top
SERIAL1_CONNECTION1  [SWITCH_DPDT_SMD_AYZ0202]  88.14,45.15 90 top
SERIAL1_CONNECTION2  [SWITCH_DPDT_SMD_AYZ0202]  156.84,45.15 90 top
U1  ESP-WROOM-3232D-NARROW  [ESP-WROOM-32D-NARROW]  41.02,108.6 90 bottom
U2  3.3V  [SOT23-5]  49.91,51.5 90 top
U3  U-BLOX_ZED-F9P  [ZED-F9P]  41.02,40.07 0 top
U4  3.3V  [SOT23-5]  41.02,59.12 90 top
U5  3.3V  [SOT23-5]  118.62,51.5 90 top
U6  CH340C  [SO016]  25.78,102.3 270 bottom
U7  MAX17048  [DFN-8]  27.05,118.81 0 bottom
U8  U-BLOX_ZED-F9P  [ZED-F9P]  109.73,40.07 0 top
U9  CH340C  [SO016]  94.49,102.3 270 bottom
U10  MCP73833  [DFN-10]  23.24,115 90 bottom
U11  MAX17048  [DFN-8]  95.76,118.81 0 bottom
U12  3.3V  [SOT23-5]  109.73,59.12 90 top
U13  MCP73833  [DFN-10]  91.95,115 90 bottom
U14  ESP-WROOM-3232D-NARROW  [ESP-WROOM-32D-NARROW]  109.73,108.6 90 bottom
U15  3.3V  [SOT23-5]  187.33,51.5 90 top
U16  U-BLOX_ZED-F9P  [ZED-F9P]  178.44,40.07 0 top
U17  CH340C  [SO016]  163.19,102.3 270 bottom
U18  MAX17048  [DFN-8]  164.47,118.81 0 bottom
U19  3.3V  [SOT23-5]  178.44,59.12 90 top
U20  MCP73833  [DFN-10]  160.66,115 90 bottom
U21  ESP-WROOM-3232D-NARROW  [ESP-WROOM-32D-NARROW]  178.44,108.6 90 bottom
U$1  [#GND#0]  60.71,37.53 0 top
U$2  [QWIIC_4MM]  109.73,20.11 0 bottom
U$3  [ROCKER_SWITCH]  23.24,66.74 90 top
U$4  [#BASE#0]  24.89,50.1 0 top
U$5  [#3V3#0]  60.07,31.32 90 top
U$6  [ANTENNA0]  25.65,25.46 0 top
U$7  [RTK0]  41.02,66.74 0 bottom
U$8  [#CHG#0]  65.53,48.57 0 top
U$9  [_SURVEYOR3]  52.2,64.32 0 bottom
U$10  [#RTK#1]  60.58,42.61 0 top
U$11  [#PPS#0]  25.27,33.72 0 bottom
U$12  [#RTK#0]  44.45,58.1 0 top
U$13  [LIGHT_PIPE_3MM]  58.8,48.69 0 top
U$14  [#RX#2]  9.27,44.64 270 bottom
U$15  [LIGHT_PIPE_3MM]  23.25,48.71 0 top
U$16  [ZED0]  11.05,44.26 90 bottom
U$17  [##SAFE##5]  25.27,36.26 0 bottom
U$18  [ACTIVE0]  26.54,26.73 0 top
U$19  [L1#L21]  27.05,28 0 top
U$20  [#PAIR#0]  44.32,73.34 0 top
U$21  [LIGHT_PIPE_3MM]  35.42,59.84 0 top
U$22  [BASE2]  18.03,53.91 0 top
U$23  [#3#5#5V#0]  14.35,21.16 90 top
U$24  [#PPS#1]  44.45,65.85 0 top
U$25  [#PWR#2]  63.37,50.35 0 top
U$26  [1553DBK-ENCLOSURE]  41.02,66.74 90 top
U$27  [LIPO0]  19.56,111.31 0 top
U$28  [##RST##4]  25.27,38.8 0 bottom
U$29  [SERIAL10]  58.93,13.28 90 top
U$30  [QWIIC_4MM]  41.02,20.11 0 bottom
U$31  [OFF1]  54.48,79.44 0 top
U$32  [#FENCE#3]  60.58,40.07 0 top
U$33  [#INT#0]  25.27,41.34 0 bottom
U$34  [ROCKER_SWITCH]  58.8,66.74 90 top
U$35  [U#BLOX0]  38.1,21.89 0 top
U$36  [USB1]  38.99,20.49 0 top
U$37  [#3V3#0]  60.58,45.15 0 top
U$38  [#GND#0]  21.97,21.16 90 top
U$39  [#RX2#2]  19.43,21.16 90 top
U$40  [#TX2#1]  16.89,21.16 90 top
U$41  [BLUETOOTH2]  13.46,28 90 top
U$42  [ON0]  55.12,54.11 0 top
U$43  [SERIAL20]  13.08,13.54 90 top
U$44  [ROVER3]  16.89,79.44 0 top
U$45  [#RX1#2]  64.52,18.97 90 top
U$46  [#TX1#1]  62.99,18.97 90 top
U$47  [#3V3#0]  61.47,18.97 90 top
U$48  [#GND#0]  66.04,18.97 90 top
U$49  [NMEA1]  68.96,13.28 90 top
U$50  [RADIO0]  23.24,13.54 90 top
U$51  [BROADCAST3]  14.99,28 90 top
U$52  [NMEA1]  16.64,36.76 0 top
U$53  [RTCM0]  16.64,28 0 top
U$54  [BASE0]  6.48,52.38 0 top
U$55  [SWITCH1]  9.65,50.99 0 top
U$56  [POWER0]  65.91,52.38 0 top
U$57  [SWITCH1]  69.09,51.11 0 top
U$58  [BLUEOOTH3]  15.37,49.97 0 top
U$59  [CNTR1]  18.8,40.57 0 top
U$60  [#ESP_RST#0]  68.96,111.44 0 bottom
U$61  [EXT0]  15.24,40.57 0 top
U$62  [NMEA2]  13.72,44.26 90 top
U$63  [SERIAL10]  12.06,43.75 90 top
U$64  [CONNECTION1]  15.11,40.7 90 top
U$65  [#TX1#1]  62.61,31.32 90 top
U$66  [USB1]  50.42,20.49 0 top
U$67  [ESP320]  49.53,21.89 0 top
U$68  [#RX1#2]  65.15,31.32 90 top
U$69  [LIGHT_PIPE_3MM]  46.62,59.84 0 top
U$70  [#GND#2]  42.29,30.03 270 bottom
U$71  [_SURVEYOR3]  30.02,113 0 top
U$72  [#TX#1]  9.27,51.75 270 bottom
U$73  [#DUAL#0]  14.35,51.37 270 bottom
U$74  [RTK0]  41.27,115.76 0 top
U$75  [LIGHT_PIPE_3MM]  46.62,67.44 0 top
U$76  [LIGHT_PIPE_3MM]  46.62,75.04 0 top
U$77  [LIGHT_PIPE_3MM]  35.42,75.04 0 top
U$78  [LIGHT_PIPE_3MM]  35.42,67.44 0 top
U$79  [#1CM#0]  33.27,58.23 0 top
U$80  [#10CM#1]  33.02,65.85 0 top
U$81  [#100CM#2]  32.64,73.47 0 top
U$82  [#GND#0]  67.69,31.32 90 top
U$83  [MICROSD0]  68.2,28.22 270 bottom
U$84  [#GND#1]  68.96,108.9 0 bottom
U$85  [#3V3#2]  44.83,30.03 270 bottom
U$86  [#SCL#1]  49.91,29.91 270 bottom
U$87  [#SDA#0]  47.37,30.03 270 bottom
U$88  [#D_SEL#0]  22.1,31.18 0 bottom
U$89  [DATA2]  9.52,30.79 90 bottom
U$90  [PORT3]  9.52,34.6 90 bottom
U$91  [PPS#RESET0]  13.72,27.87 0 bottom
U$92  [NMEA#SERIAL1]  13.59,37.14 0 bottom
U$93  [QWIIC_4MM]  11.05,73.45 0 top
U$94  [V170]  53.72,112.46 0 top
U$95  [V170]  41.02,61.66 0 bottom
U$96  [#RTK#0]  113.16,58.1 0 top
U$97  [#PPS#1]  113.16,65.85 0 top
U$98  [#PWR#2]  132.08,50.35 0 top
U$99  [#3V3#0]  129.29,45.15 0 top
U$100  [#GND#0]  129.41,37.53 0 top
U$101  [ANTENNA0]  94.36,25.46 0 top
U$102  [_SURVEYOR3]  120.9,64.32 0 bottom
U$103  [#RTK#1]  129.29,42.61 0 top
U$104  [ACTIVE0]  95.25,26.73 0 top
U$105  [L1#L21]  95.76,28 0 top
U$106  [#PAIR#0]  113.03,73.34 0 top
U$107  [1553DBK-ENCLOSURE]  109.73,66.74 90 top
U$108  [#CHG#0]  134.24,48.57 0 top
U$109  [LIPO0]  88.27,111.31 0 top
U$110  [U#BLOX0]  106.81,21.89 0 top
U$111  [USB1]  107.7,20.49 0 top
U$112  [SERIAL20]  81.79,13.54 90 top
U$113  [SERIAL10]  127.64,13.28 90 top
U$114  [ROCKER_SWITCH]  127.51,66.74 90 top
U$115  [#BASE#0]  93.6,50.1 0 top
U$116  [ROCKER_SWITCH]  91.95,66.74 90 top
U$117  [LIGHT_PIPE_3MM]  127.5,48.69 0 top
U$118  [LIGHT_PIPE_3MM]  104.13,59.84 0 top
U$119  [BASE2]  86.74,53.91 0 top
U$120  [OFF1]  123.19,79.44 0 top
U$121  [ON0]  123.83,54.11 0 top
U$122  [ROVER3]  85.6,79.44 0 top
U$123  [#RX2#2]  88.14,21.16 90 top
U$124  [#TX2#1]  85.6,21.16 90 top
U$125  [#RX1#2]  133.22,18.97 90 top
U$126  [#TX1#1]  131.7,18.97 90 top
U$127  [#3V3#0]  130.17,18.97 90 top
U$128  [#GND#0]  134.75,18.97 90 top
U$129  [#GND#0]  90.68,21.16 90 top
U$130  [NMEA1]  137.67,13.28 90 top
U$131  [RADIO0]  91.95,13.54 90 top
U$132  [##RST##4]  93.98,38.8 0 bottom
U$133  [##SAFE##5]  93.98,36.26 0 bottom
U$134  [#FENCE#3]  129.29,40.07 0 top
U$135  [#INT#0]  93.98,41.34 0 bottom
U$136  [BASE0]  75.18,52.38 0 top
U$137  [SWITCH1]  78.36,50.99 0 top
U$138  [POWER0]  134.62,52.38 0 top
U$139  [SWITCH1]  137.8,51.11 0 top
U$140  [#3#5#5V#0]  83.06,21.16 90 top
U$141  [BLUETOOTH2]  82.17,28 90 top
U$142  [BROADCAST3]  83.69,28 90 top
U$143  [NMEA1]  85.34,36.76 0 top
U$144  [RTCM0]  85.34,28 0 top
U$145  [BLUEOOTH3]  84.07,49.97 0 top
U$146  [CNTR1]  87.5,40.57 0 top
U$147  [EXT0]  83.95,40.57 0 top
U$148  [NMEA2]  82.42,44.26 90 top
U$149  [SERIAL10]  80.77,43.75 90 top
U$150  [CONNECTION1]  83.82,40.7 90 top
U$151  [LIGHT_PIPE_3MM]  91.95,48.71 0 top
U$152  [#PPS#0]  93.98,33.72 0 bottom
U$153  [_SURVEYOR3]  98.73,113 0 top
U$154  [#RX#2]  77.98,44.64 270 bottom
U$155  [ZED0]  79.76,44.26 90 bottom
U$156  [#TX#1]  77.98,51.75 270 bottom
U$157  [#DUAL#0]  83.06,51.37 270 bottom
U$158  [LIGHT_PIPE_3MM]  115.33,59.84 0 top
U$159  [LIGHT_PIPE_3MM]  115.33,67.44 0 top
U$160  [LIGHT_PIPE_3MM]  115.33,75.04 0 top
U$161  [LIGHT_PIPE_3MM]  104.13,75.04 0 top
U$162  [LIGHT_PIPE_3MM]  104.13,67.44 0 top
U$163  [#1CM#0]  101.98,58.23 0 top
U$164  [#10CM#1]  101.73,65.85 0 top
U$165  [#100CM#2]  101.35,73.47 0 top
U$166  [USB1]  119.13,20.49 0 top
U$167  [ESP320]  118.24,21.89 0 top
U$168  [#3V3#0]  128.78,31.32 90 top
U$169  [#TX1#1]  131.32,31.32 90 top
U$170  [#RX1#2]  133.86,31.32 90 top
U$171  [#GND#0]  136.4,31.32 90 top
U$172  [MICROSD0]  136.91,28.22 270 bottom
U$173  [#GND#1]  137.67,108.9 0 bottom
U$174  [#ESP_RST#0]  137.67,111.44 0 bottom
U$175  [RTK0]  109.98,115.76 0 top
U$176  [RTK0]  109.73,66.74 0 bottom
U$177  [#GND#2]  111,30.03 270 bottom
U$178  [#3V3#2]  113.54,30.03 270 bottom
U$179  [#SCL#1]  118.62,29.91 270 bottom
U$180  [#SDA#0]  116.08,30.03 270 bottom
U$181  [#D_SEL#0]  90.81,31.18 0 bottom
U$182  [DATA2]  78.23,30.79 90 bottom
U$183  [PORT3]  78.23,34.6 90 bottom
U$184  [PPS#RESET0]  82.42,27.87 0 bottom
U$185  [NMEA#SERIAL1]  82.3,37.14 0 bottom
U$186  [QWIIC_4MM]  79.76,73.45 0 top
U$187  [V170]  122.43,112.46 0 top
U$188  [V170]  109.73,61.66 0 bottom
U$189  [QWIIC_4MM]  178.44,20.11 0 bottom
U$190  [#RTK#0]  181.86,58.1 0 top
U$191  [#PPS#1]  181.86,65.85 0 top
U$192  [#PWR#2]  200.79,50.35 0 top
U$193  [#3V3#0]  197.99,45.15 0 top
U$194  [#GND#0]  198.12,37.53 0 top
U$195  [ANTENNA0]  163.07,25.46 0 top
U$196  [_SURVEYOR3]  189.61,64.32 0 bottom
U$197  [#RTK#1]  197.99,42.61 0 top
U$198  [ACTIVE0]  163.96,26.73 0 top
U$199  [L1#L21]  164.47,28 0 top
U$200  [#PAIR#0]  181.74,73.34 0 top
U$201  [1553DBK-ENCLOSURE]  178.44,66.74 90 top
U$202  [#CHG#0]  202.95,48.57 0 top
U$203  [LIPO0]  156.97,111.31 0 top
U$204  [U#BLOX0]  175.51,21.89 0 top
U$205  [USB1]  176.4,20.49 0 top
U$206  [SERIAL20]  150.5,13.54 90 top
U$207  [SERIAL10]  196.34,13.28 90 top
U$208  [ROCKER_SWITCH]  196.22,66.74 90 top
U$209  [#BASE#0]  162.31,50.1 0 top
U$210  [ROCKER_SWITCH]  160.66,66.74 90 top
U$211  [LIGHT_PIPE_3MM]  196.21,48.69 0 top
U$212  [LIGHT_PIPE_3MM]  172.84,59.84 0 top
U$213  [BASE2]  155.45,53.91 0 top
U$214  [OFF1]  191.9,79.44 0 top
U$215  [ON0]  192.53,54.11 0 top
U$216  [ROVER3]  154.31,79.44 0 top
U$217  [#RX2#2]  156.84,21.16 90 top
U$218  [#TX2#1]  154.31,21.16 90 top
U$219  [#RX1#2]  201.93,18.97 90 top
U$220  [#TX1#1]  200.41,18.97 90 top
U$221  [#3V3#0]  198.88,18.97 90 top
U$222  [#GND#0]  203.45,18.97 90 top
U$223  [#GND#0]  159.38,21.16 90 top
U$224  [NMEA1]  206.38,13.28 90 top
U$225  [RADIO0]  160.66,13.54 90 top
U$226  [##RST##4]  162.69,38.8 0 bottom
U$227  [##SAFE##5]  162.69,36.26 0 bottom
U$228  [#FENCE#3]  197.99,40.07 0 top
U$229  [#INT#0]  162.69,41.34 0 bottom
U$230  [BASE0]  143.89,52.38 0 top
U$231  [SWITCH1]  147.07,50.99 0 top
U$232  [POWER0]  203.33,52.38 0 top
U$233  [SWITCH1]  206.5,51.11 0 top
U$234  [#3#5#5V#0]  151.77,21.16 90 top
U$235  [BLUETOOTH2]  150.88,28 90 top
U$236  [BROADCAST3]  152.4,28 90 top
U$237  [NMEA1]  154.05,36.76 0 top
U$238  [RTCM0]  154.05,28 0 top
U$239  [BLUEOOTH3]  152.78,49.97 0 top
U$240  [CNTR1]  156.21,40.57 0 top
U$241  [EXT0]  152.65,40.57 0 top
U$242  [NMEA2]  151.13,44.26 90 top
U$243  [SERIAL10]  149.48,43.75 90 top
U$244  [CONNECTION1]  152.53,40.7 90 top
U$245  [LIGHT_PIPE_3MM]  160.66,48.71 0 top
U$246  [#PPS#0]  162.69,33.72 0 bottom
U$247  [_SURVEYOR3]  167.44,113 0 top
U$248  [#RX#2]  146.69,44.64 270 bottom
U$249  [ZED0]  148.46,44.26 90 bottom
U$250  [#TX#1]  146.69,51.75 270 bottom
U$251  [#DUAL#0]  151.77,51.37 270 bottom
U$252  [LIGHT_PIPE_3MM]  184.03,59.84 0 top
U$253  [LIGHT_PIPE_3MM]  184.03,67.44 0 top
U$254  [LIGHT_PIPE_3MM]  184.03,75.04 0 top
U$255  [LIGHT_PIPE_3MM]  172.84,75.04 0 top
U$256  [LIGHT_PIPE_3MM]  172.84,67.44 0 top
U$257  [#1CM#0]  170.69,58.23 0 top
U$258  [#10CM#1]  170.43,65.85 0 top
U$259  [#100CM#2]  170.05,73.47 0 top
U$260  [USB1]  187.83,20.49 0 top
U$261  [ESP320]  186.94,21.89 0 top
U$262  [#3V3#0]  197.49,31.32 90 top
U$263  [#TX1#1]  200.03,31.32 90 top
U$264  [#RX1#2]  202.56,31.32 90 top
U$265  [#GND#0]  205.11,31.32 90 top
U$266  [MICROSD0]  205.61,28.22 270 bottom
U$267  [#GND#1]  206.38,108.9 0 bottom
U$268  [#ESP_RST#0]  206.38,111.44 0 bottom
U$269  [RTK0]  178.69,115.76 0 top
U$270  [RTK0]  178.44,66.74 0 bottom
U$271  [#GND#2]  179.71,30.03 270 bottom
U$272  [#3V3#2]  182.25,30.03 270 bottom
U$273  [#SCL#1]  187.33,29.91 270 bottom
U$274  [#SDA#0]  184.78,30.03 270 bottom
U$275  [#D_SEL#0]  159.51,31.18 0 bottom
U$276  [DATA2]  146.94,30.79 90 bottom
U$277  [PORT3]  146.94,34.6 90 bottom
U$278  [PPS#RESET0]  151.13,27.87 0 bottom
U$279  [NMEA#SERIAL1]  151,37.14 0 bottom
U$280  [QWIIC_4MM]  148.46,73.45 0 top
U$281  [V170]  191.13,112.46 0 top
U$282  [V170]  178.44,61.66 0 bottom
ZED_CONTROL  [SWITCH_DPDT_SMD_AYZ0202]  13.74,32.45 90 bottom
ZED_CONTROL1  [SWITCH_DPDT_SMD_AYZ0202]  82.45,32.45 90 bottom
ZED_CONTROL2  [SWITCH_DPDT_SMD_AYZ0202]  151.16,32.45 90 bottom

## Library data of the parts
BLUETOOTH_BROADCAST BLUETOOTH_BROADCAST1 BLUETOOTH_BROADCAST2 SERIAL1_CONNECTION SERIAL1_CONNECTION1 SERIAL1_CONNECTION2 ZED_CONTROL ZED_CONTROL1 ZED_CONTROL2 = SparkFun-Switches; PROD_ID: SWCH-08179; SF_SKU: COM-00597
BT1-BT3 = SparkFun-Batteries; PROD_ID: BATT-13243; SF_SKU: PRT-13813
C1 C21 C38 = SparkFun-Capacitors; PROD_ID: CAP-15063
C2-C4 C6 C17 C18 C20 C22 C33-C35 C37 C39 C50 C51 = SparkFun-Capacitors; PROD_ID: CAP-13930
C5 C7 C19 C23 C36 C40 = SparkFun-Capacitors; PROD_ID: CAP-08604
C8 C9 C24 C25 C41 C42 = SparkFun-Capacitors; PROD_ID: CAP-14106
C10 C14 C26 C30 C43 C47 = SparkFun-Capacitors; PROD_ID: CAP-11015
C11-C13 C15 C16 C27-C29 C31 C32 C44-C46 C48 C49 = SparkFun-Capacitors; PROD_ID: CAP-00810
D1 D5 D27 = SparkFun-LED; PROD_ID: DIO-09003
D2 D6 D16 D24 D29 D37 = SparkFun-IC-Power; PROD_ID: DIO-14084
D3 D15 D28 = SparkFun-LED; PROD_ID: DIO-09004
D4 D22 D35 = SparkFun-LED; PROD_ID: DIO-08575
D7 D9 D18 D23 D31 D36 = SparkFun-DiscreteSemi; PROD_ID: DIO-14072
D8 D10 D11 D19-D21 D32-D34 = SparkFun-LED; PROD_ID: DIO-00821
D12 D17 D30 = SparkFun-LED; PROD_ID: DIO-00819
D13 D25 D38 = SparkFun-LED; PROD_ID: DIO-16048
D14 D26 D39 = SparkFun-DiscreteSemi; DIGIKEY_PART: PESD0402-140CT-ND; MOUSE_PART: 650-PESD0402-140; PROD_ID: DIO-15359
DUAL_OUTPUT DUAL_OUTPUT1 DUAL_OUTPUT2 MEAS MEAS1-MEAS5 = SparkFun-Jumpers
E1-E3 = SparkFun-RF; PROD_ID: CONN-08289
E$1-E$4 JP1-JP8 JP21 JP61 JP71 JP81 LOGO1-LOGO9 U$2 U$30 U$93 U$186 U$189 U$280 = SparkFun-Aesthetics
E$5 E$6 = SparkFun-Retired
FB1-FB3 = SparkFun-Coils; PROD_ID: NDUC-15072
J1 J10-J12 J14 J15 J17 J18 J23 J28-J31 J33-J35 J41 J46-J49 J51-J53 = SparkFun-Connectors
J2 J9 J26 J27 J44 J45 = SparkFun-Connectors; PROD_ID: CONN-15303
J3 J5 J20 J25 J38 J43 = SparkFun-Connectors; PROD_ID: CONN-14122
J4 J19 J37 = SparkFun-Connectors; PROD_ID: CONN-13694; VALUE: Qwiic Right Angle
J6 J7 J21 J24 J39 J42 = SparkFun-Connectors; PROD_ID: CONN-11443
J8 J22 J40 = SparkFun-Connectors; PROD_ID: CONN-11443; SF_ID: PRT-08612
J13 J36 J54 = SparkFun-Connectors; PROD_ID: CONN-13694
J16 J32 J50 = SparkFun-Connectors; PROD_ID: CONN-07820
Q1-Q3 = SparkFun-DiscreteSemi; PROD_ID: TRANS-13337
R1 R55 R85 = SparkFun-Resistors; PROD_ID: RES-07857
R2 R4 R9 R39 R40 R53 R69 R70 R83 = SparkFun-Resistors; PROD_ID: RES-15081
R3 R41 R71 = SparkFun-Resistors; PROD_ID: RES-08270
R5 R59 R89 = SparkFun-Resistors; PROD_ID: RES-08609
R6-R8 R43 R56 R57 R73 R86 R87 = SparkFun-Resistors; PROD_ID: RES-07856
R10 R12 R31 R34 R42 R52 R64 R72 R82 = SparkFun-Resistors; PROD_ID: RES-00818
R11 R19 R24-R26 R44-R46 R61 R74-R76 = SparkFun-Resistors; PROD_ID: RES-07862
R13 R15 R33 R54 R66 R84 = SparkFun-Resistors; PROD_ID: RES-07828
R14 R32 R65 = SparkFun-Resistors; PROD_ID: RES-12581
R16 R17 R35-R38 R50 R51 R67 R68 R80 R81 = SparkFun-Resistors; PROD_ID: RES-12083
R18 R60 R90 = SparkFun-Resistors; PROD_ID: RES-13608
R20 R23 R29 R47-R49 R77-R79 = SparkFun-Resistors; PROD_ID: RES-00824
R21 R22 R27 R28 R62 R63 = SparkFun-Resistors; PROD_ID: RES-09334
R30 R58 R88 = SparkFun-Resistors; PROD_ID: RES-09117
U1 U14 U21 = SparkFun-RF; PROD_ID: IC-15676
U2 U4 U5 U12 U15 U19 = SparkFun-IC-Power; PROD_ID: VREG-12457
U3 U8 U16 = SparkFun-GPS; PROD_ID: IC-14209
U6 U9 U17 = SparkFun-IC-Comms; PROD_ID: IC-14038
U7 U11 U18 = SparkFun-IC-Power; PROD_ID: IC-12551
U10 U13 U20 = SparkFun-IC-Power; PROD_ID: IC-14369
U$1 U$4-U$12 U$14 U$16-U$20 U$22-U$25 U$27-U$29 U$31-U$33 U$35-U$68 U$70-U$74 U$79-U$92 U$94-U$106 U$108-U$113 U$115 U$119-U$150 U$152-U$157 U$163-U$185 U$187 U$188 U$190-U$200 U$202-U$207 U$209 U$213-U$244 U$246-U$251 U$257-U$279 U$281 U$282 = output
U$3 U$13 U$15 U$21 U$26 U$34 U$69 U$75-U$78 U$107 U$114 U$116-U$118 U$151 U$158-U$162 U$201 U$208 U$210-U$212 U$245 U$252-U$256 = SparkFun GPS RTK Surveyor

## Nets
3.3V [power]: C2.1 C4.1 C5.2 C7.2 C10.1 C11.1 C13.1 C14.1 C16.1 J1.4 J2.1 J4.2 J12.4 J13.2 J16.VCC J17.2 R12.2 R13.2 R15.2 R20.2 U1.2 U2.5 U3.33 U3.34 U3.38 U6.4 U6.16
3.3V1 [power]: C3.1 C19.2 C22.1 C23.2 C26.1 C27.1 C29.1 C30.1 C31.1 J19.2 J27.1 J29.4 J30.4 J32.VCC J34.2 J36.2 R31.2 R33.2 R47.2 R54.2 U5.5 U8.33 U8.34 U8.38 U9.4 U9.16 U14.2
3.3V2 [power]: C35.1 C36.2 C39.1 C40.2 C43.1 C44.1 C46.1 C47.1 C48.1 J37.2 J45.1 J47.4 J48.4 J50.VCC J52.2 J54.2 R64.2 R66.2 R77.2 R84.2 U15.5 U16.33 U16.34 U16.38 U17.4 U17.16 U21.2
5V [power]: C6.1 J7.1 J9.1 J11.4 U2.1 U2.3
5V1 [power]: C20.1 J21.1 J26.1 J28.4 U5.1 U5.3
5V2 [power]: C37.1 J39.1 J44.1 J46.4 U15.1 U15.3
ANT_VCC: C1.1 FB1.2 R14.1
ANT_VCC1: C21.1 FB2.2 R32.1
ANT_VCC2: C38.1 FB3.2 R65.1
BACKUP: C18.1 U3.36 U4.5
BACKUP1: C34.1 U8.36 U12.5
BACKUP2: C51.1 U16.36 U19.5
CC1: J5.A5 R17.2
CC2: J5.B5 R16.2
CC3: J3.B5 R37.2
CC4: J3.A5 R38.2
CC5: J20.A5 R36.2
CC6: J20.B5 R35.2
CC7: J25.B5 R50.2
CC8: J25.A5 R51.2
CC9: J38.A5 R68.2
CC10: J38.B5 R67.2
CC11: J43.B5 R80.2
CC12: J43.A5 R81.2
CHG_LED: R1.2 U10.3
CHG_LED1: R55.2 U13.3
CHG_LED2: R85.2 U20.3
CHG_THERM1: R5.2 R18.2 R30.2
CHG_THERM2: R58.2 R59.2 R60.2
CHG_THERM3: R88.2 R89.2 R90.2
D+: D6.4 R27.1
D+1: D2.4 U6.5
D+2: D16.4 R21.1
D+3: D24.4 U9.5
D+4: D29.4 R62.1
D+5: D37.4 U17.5
D-: D6.6 R28.1
D-1: D2.6 U6.6
D-2: D16.6 R22.1
D-3: D24.6 U9.6
D-4: D29.6 R63.1
D-5: D37.6 U17.6
ESP32_!DTR: Q2.1 R23.1 U6.13
ESP32_!DTR1: Q1.1 R48.1 U9.13
ESP32_!DTR2: Q3.1 R78.1 U17.13
ESP32_!RTS: Q2.4 R29.1 U6.14
ESP32_!RTS1: Q1.4 R49.1 U9.14
ESP32_!RTS2: Q3.4 R79.1 U17.14
ESP32_EN: C12.1 J14.1 Q2.3 R20.1 U1.3
ESP32_EN1: C28.1 J33.1 Q1.3 R47.1 U14.3
ESP32_EN2: C45.1 J51.1 Q3.3 R77.1 U21.3
ESP32_RXI: U1.34 U6.2
ESP32_RXI1: U9.2 U14.34
ESP32_RXI2: U17.2 U21.34
ESP32_TXO: U1.35 U6.3
ESP32_TXO1: U9.3 U14.35
ESP32_TXO2: U17.3 U21.35
ESP_0/BOOT: Q2.6 U1.25
ESP_0/BOOT1: Q1.6 U14.25
ESP_0/BOOT2: Q3.6 U21.25
ESP_1: U14.13
ESP_2: U21.13
ESP_2/LED_1CM: R26.1 U1.24
ESP_2/LED_1CM1: R46.1 U14.24
ESP_2/LED_1CM2: R76.1 U21.24
ESP_4/LED_BASE_STAT: R34.1 U1.26
ESP_4/LED_BASE_STAT1: R42.1 U14.26
ESP_4/LED_BASE_STAT2: R72.1 U21.26
ESP_5/SWITCH_BASE_SELECT: J6.1 U1.29
ESP_5/SWITCH_BASE_SELECT1: J24.1 U14.29
ESP_5/SWITCH_BASE_SELECT2: J42.1 U21.29
ESP_12/LED_BLUETOOTH: R10.1 U1.14
ESP_12/LED_BLUETOOTH1: R52.1 U14.14
ESP_12/LED_BLUETOOTH2: R82.1 U21.14
ESP_13/LED_100CM: R24.1 U1.16
ESP_13/LED_100CM1: R44.1 U14.16
ESP_13/LED_100CM2: R74.1 U21.16
ESP_14: U1.13
ESP_15/LED_10CM: R25.1 U1.23
ESP_15/LED_10CM1: R45.1 U14.23
ESP_15/LED_10CM2: R75.1 U21.23
ESP_16/BT_RXI: BLUETOOTH_BROADCAST.2 U1.27
ESP_16/BT_RXI1: BLUETOOTH_BROADCAST1.2 U14.27
ESP_16/BT_RXI2: BLUETOOTH_BROADCAST2.2 U21.27
ESP_17/BT_TXO: BLUETOOTH_BROADCAST.5 U1.28
ESP_17/BT_TXO1: BLUETOOTH_BROADCAST1.5 U14.28
ESP_17/BT_TXO2: BLUETOOTH_BROADCAST2.5 U21.28
ESP_18/SD_SCK: J16.SCLK U1.30
ESP_18/SD_SCK1: J32.SCLK U14.30
ESP_18/SD_SCK2: J50.SCLK U21.30
ESP_19/SD_CIPO: J16.DO/DAT0 U1.31
ESP_19/SD_CIPO1: J32.DO/DAT0 U14.31
ESP_19/SD_CIPO2: J50.DO/DAT0 U21.31
ESP_21/SDA: J4.3 J13.3 J17.3 R9.P6 U1.33 U7.8
ESP_21/SDA1: J19.3 J34.3 J36.3 R39.P6 U11.8 U14.33
ESP_21/SDA2: J37.3 J52.3 J54.3 R69.P6 U18.8 U21.33
ESP_22/SCL: J4.4 J13.4 J17.4 R9.P7 U1.36 U7.7
ESP_22/SCL1: J19.4 J34.4 J36.4 R39.P7 U11.7 U14.36
ESP_22/SCL2: J37.4 J52.4 J54.4 R69.P7 U18.7 U21.36
ESP_23/SD_COPI: J16.DI/CMD U1.37
ESP_23/SD_COPI1: J32.DI/CMD U14.37
ESP_23/SD_COPI2: J50.DI/CMD U21.37
ESP_25/SD_!CS!: J16.CS/DAT3 R13.1 U1.10
ESP_25/SD_!CS!1: J32.CS/DAT3 R54.1 U14.10
ESP_25/SD_!CS!2: J50.CS/DAT3 R84.1 U21.10
ESP_26/ZED_TX_READY: J18.1 R9.P8 U1.11
ESP_26/ZED_TX_READY1: J35.1 R39.P8 U14.11
ESP_26/ZED_TX_READY2: J53.1 R69.P8 U21.11
ESP_26/ZED_TX_READY_LV: R9.P1 U3.46
ESP_26/ZED_TX_READY_LV1: R39.P1 U8.46
ESP_26/ZED_TX_READY_LV2: R69.P1 U16.46
ESP_27/ZED_!RESET!: J18.2 R2.P5 U1.12 ZED_CONTROL.4
ESP_27/ZED_!RESET!1: J35.2 R40.P5 U14.12 ZED_CONTROL1.4
ESP_27/ZED_!RESET!2: J53.2 R70.P5 U21.12 ZED_CONTROL2.4
ESP_27/ZED_!RESET!_LV: R2.P4 U3.49
ESP_27/ZED_!RESET!_LV1: R40.P4 U8.49
ESP_27/ZED_!RESET!_LV2: R70.P4 U16.49
ESP_32/PWR_LVL_RED: D13.5 U1.8
ESP_32/PWR_LVL_RED1: D25.5 U14.8
ESP_32/PWR_LVL_RED2: D38.5 U21.8
ESP_33/PWR_LVL_GRN: D13.4 U1.9
ESP_33/PWR_LVL_GRN1: D25.4 U14.9
ESP_33/PWR_LVL_GRN2: D38.4 U21.9
ESP_36/BATT_ALRT: U1.4 U7.5
ESP_36/BATT_ALRT1: U11.5 U14.4
ESP_36/BATT_ALRT2: U18.5 U21.4
ESP_D1+: D2.3 J3.A6 J3.B6
ESP_D1+1: D24.3 J25.A6 J25.B6
ESP_D1+2: D37.3 J43.A6 J43.B6
ESP_D1-: D2.1 J3.A7 J3.B7
ESP_D1-1: D24.1 J25.A7 J25.B7
ESP_D1-2: D37.1 J43.A7 J43.B7
ESP_I1: U14.5
ESP_I2: U14.6
ESP_I3: U14.7
ESP_I4: U21.5
ESP_I5: U21.6
ESP_I6: U21.7
ESP_I34: U1.6
ESP_I35: U1.7
ESP_I39: U1.5
EXTERNAL_SERIAL1_RXI: SERIAL1_CONNECTION.4 ZED_CONTROL.6
EXTERNAL_SERIAL1_RXI1: SERIAL1_CONNECTION1.4 ZED_CONTROL1.6
EXTERNAL_SERIAL1_RXI2: SERIAL1_CONNECTION2.4 ZED_CONTROL2.6
EXTERNAL_SERIAL1_RXI/ZED_!RESET!: J2.3 J12.2 ZED_CONTROL.5
EXTERNAL_SERIAL1_RXI/ZED_!RESET!1: J27.3 J29.2 ZED_CONTROL1.5
EXTERNAL_SERIAL1_RXI/ZED_!RESET!2: J45.3 J47.2 ZED_CONTROL2.5
EXTERNAL_SERIAL1_TXO: DUAL_OUTPUT.2 SERIAL1_CONNECTION.1 ZED_CONTROL.3
EXTERNAL_SERIAL1_TXO1: DUAL_OUTPUT1.2 SERIAL1_CONNECTION1.1 ZED_CONTROL1.3
EXTERNAL_SERIAL1_TXO2: DUAL_OUTPUT2.2 SERIAL1_CONNECTION2.1 ZED_CONTROL2.3
EXTERNAL_SERIAL1_TXO/PPS: J2.2 J12.3 ZED_CONTROL.2
EXTERNAL_SERIAL1_TXO/PPS1: J27.2 J29.3 ZED_CONTROL1.2
EXTERNAL_SERIAL1_TXO/PPS2: J45.2 J47.3 ZED_CONTROL2.2
FENCE_LV: R4.P8 U3.19
FENCE_LV1: R53.P8 U8.19
FENCE_LV2: R83.P8 U16.19
GND: C1.2 C2.2 C4.2 C5.1 C6.2 C7.1 C8.2 C9.2 C10.2 C11.2 C12.2 C13.2 C14.2 C15.2 C16.2 C17.2 C18.2 D1.C D2.2 D4.C D6.2 D8.C D10.C D11.C D12.C D14.2 E1.GND@0 E1.GND@1 E1.GND@2 E1.GND@3 J1.1 J2.4 J3.GND J3.GND2 J3.SHLD1 J3.SHLD2 J3.SHLD3 J3.SHLD4 J4.1 J5.GND J5.GND2 J5.SHLD1 J5.SHLD2 J5.SHLD3 J5.SHLD4 J6.2 J8.1 J9.4 J10.2 J11.1 J12.1 J13.1 J14.2 J16.CD1 J16.GND J16.GND1 J16.GND3 J17.1 R6.2 R7.1 R8.2 R15.1 R16.1 R17.1 R18.1 R30.1 R37.1 R38.1 U1.1 U1.15 U1.38 U1.GND1 U1.GNDT1 U1.GNDT2 U1.GNDT3 U1.GNDT4 U1.GNDT5 U1.GNDT6 U1.GNDT7 U1.GNDT8 U2.2 U3.1 U3.3 U3.12 U3.14 U3.32 U3.37 U3.41 U3.48 U3.55 U3.56 U3.57 U3.58 U3.59 U3.60 U3.61 U3.62 U3.63 U3.64 U3.65 U3.66 U3.67 U3.68 U3.69 U3.70 U3.71 U3.72 U3.73 U3.74 U3.75 U3.76 U3.77 U3.78 U3.79 U3.80 U3.81 U3.82 U3.83 U3.84 U3.85 U3.86 U3.87 U3.88 U3.89 U3.90 U3.91 U3.92 U3.93 U3.94 U3.95 U3.96 U3.97 U3.98 U3.99 U3.100 U3.101 U3.102 U4.2 U6.1 U7.1 U7.4 U7.6 U7.9 U10.5 U10.11
GND1: C3.2 C19.1 C20.2 C21.2 C22.2 C23.1 C24.2 C25.2 C26.2 C27.2 C28.2 C29.2 C30.2 C31.2 C32.2 C33.2 C34.2 D5.C D16.2 D17.C D19.C D20.C D21.C D22.C D24.2 D26.2 E2.GND@0 E2.GND@1 E2.GND@2 E2.GND@3 J19.1 J20.GND J20.GND2 J20.SHLD1 J20.SHLD2 J20.SHLD3 J20.SHLD4 J22.1 J23.2 J24.2 J25.GND J25.GND2 J25.SHLD1 J25.SHLD2 J25.SHLD3 J25.SHLD4 J26.4 J27.4 J28.1 J29.1 J30.1 J32.CD1 J32.GND J32.GND1 J32.GND3 J33.2 J34.1 J36.1 R33.1 R35.1 R36.1 R43.1 R50.1 R51.1 R56.2 R57.2 R58.1 R60.1 U5.2 U8.1 U8.3 U8.12 U8.14 U8.32 U8.37 U8.41 U8.48 U8.55 U8.56 U8.57 U8.58 U8.59 U8.60 U8.61 U8.62 U8.63 U8.64 U8.65 U8.66 U8.67 U8.68 U8.69 U8.70 U8.71 U8.72 U8.73 U8.74 U8.75 U8.76 U8.77 U8.78 U8.79 U8.80 U8.81 U8.82 U8.83 U8.84 U8.85 U8.86 U8.87 U8.88 U8.89 U8.90 U8.91 U8.92 U8.93 U8.94 U8.95 U8.96 U8.97 U8.98 U8.99 U8.100 U8.101 U8.102 U9.1 U11.1 U11.4 U11.6 U11.9 U12.2 U13.5 U13.11 U14.1 U14.15 U14.38 U14.GND1 U14.GNDT1 U14.GNDT2 U14.GNDT3 U14.GNDT4 U14.GNDT5 U14.GNDT6 U14.GNDT7 U14.GNDT8
GND2: C35.2 C36.1 C37.2 C38.2 C39.2 C40.1 C41.2 C42.2 C43.2 C44.2 C45.2 C46.2 C47.2 C48.2 C49.2 C50.2 C51.2 D27.C D29.2 D30.C D32.C D33.C D34.C D35.C D37.2 D39.2 E3.GND@0 E3.GND@1 E3.GND@2 E3.GND@3 J37.1 J38.GND J38.GND2 J38.SHLD1 J38.SHLD2 J38.SHLD3 J38.SHLD4 J40.1 J41.2 J42.2 J43.GND J43.GND2 J43.SHLD1 J43.SHLD2 J43.SHLD3 J43.SHLD4 J44.4 J45.4 J46.1 J47.1 J48.1 J50.CD1 J50.GND J50.GND1 J50.GND3 J51.2 J52.1 J54.1 R66.1 R67.1 R68.1 R73.1 R80.1 R81.1 R86.2 R87.2 R88.1 R90.1 U15.2 U16.1 U16.3 U16.12 U16.14 U16.32 U16.37 U16.41 U16.48 U16.55 U16.56 U16.57 U16.58 U16.59 U16.60 U16.61 U16.62 U16.63 U16.64 U16.65 U16.66 U16.67 U16.68 U16.69 U16.70 U16.71 U16.72 U16.73 U16.74 U16.75 U16.76 U16.77 U16.78 U16.79 U16.80 U16.81 U16.82 U16.83 U16.84 U16.85 U16.86 U16.87 U16.88 U16.89 U16.90 U16.91 U16.92 U16.93 U16.94 U16.95 U16.96 U16.97 U16.98 U16.99 U16.100 U16.101 U16.102 U17.1 U18.1 U18.4 U18.6 U18.9 U19.2 U20.5 U20.11 U21.1 U21.15 U21.38 U21.GND1 U21.GNDT1 U21.GNDT2 U21.GNDT3 U21.GNDT4 U21.GNDT5 U21.GNDT6 U21.GNDT7 U21.GNDT8
GPS_ANT1 [RF]: D14.1 E1.SIG FB1.1 U3.2
GPS_ANT2 [RF]: D26.1 E2.SIG FB2.1 U8.2
GPS_ANT3 [RF]: D39.1 E3.SIG FB3.1 U16.2
LIPO_RAW: J8.2 MEAS1.1 MEAS1.3
LIPO_RAW1: J22.2 MEAS3.1 MEAS3.3
LIPO_RAW2: J40.2 MEAS5.1 MEAS5.3
N$1: D3.A R12.1
N$2: D1.A R11.1
N$3: D4.A R10.2
N$4 [power]: J5.VBUS1 J5.VBUS2 MEAS.1 MEAS.3
N$5: R5.1 U10.8
N$6: D13.1 R1.1
N$7: D13.3 R6.1
N$8: D13.2 R8.1
N$9: D5.A R19.1
N$10: R21.2 U8.40
N$11: R27.2 U3.40
N$12: R28.2 U3.39
N$13: R14.2 U3.7
N$14: R22.2 U8.39
N$15: D15.A R31.1
N$16: R32.2 U8.7
N$17: D17.A R42.2
N$18: D19.A R44.2
N$19: D20.A R45.2
N$20: D21.A R46.2
N$21: Q1.5 R48.2
N$22: Q1.2 R49.2
N$23 [power]: D23.A J25.VBUS1 J25.VBUS2
N$24: Q2.5 R23.2
N$25: Q2.2 R29.2
N$26: D8.A R24.2
N$27: D10.A R25.2
N$28: D22.A R52.2
N$29: D11.A R26.2
N$30: D12.A R34.2
N$31 [power]: J20.VBUS1 J20.VBUS2 MEAS2.1 MEAS2.3
N$32 [power]: D9.A J3.VBUS1 J3.VBUS2
N$33: R59.1 U13.8
N$34: D25.1 R55.1
N$35: D25.3 R56.1
N$36: D25.2 R57.1
N$37: D27.A R61.1
N$38: R62.2 U16.40
N$39: R63.2 U16.39
N$40: D28.A R64.1
N$41: R65.2 U16.7
N$42: D30.A R72.2
N$43: D32.A R74.2
N$44: D33.A R75.2
N$45: D34.A R76.2
N$46: Q3.5 R78.2
N$47: Q3.2 R79.2
N$48 [power]: D36.A J43.VBUS1 J43.VBUS2
N$49: D35.A R82.2
N$50 [power]: J38.VBUS1 J38.VBUS2 MEAS4.1 MEAS4.3
N$51: R89.1 U20.8
N$52: D38.1 R85.1
N$53: D38.3 R86.1
N$54: D38.2 R87.1
NMEA-RX: BLUETOOTH_BROADCAST.6 SERIAL1_CONNECTION.6
NMEA-RX1: BLUETOOTH_BROADCAST1.6 SERIAL1_CONNECTION1.6
NMEA-RX2: BLUETOOTH_BROADCAST2.6 SERIAL1_CONNECTION2.6
NMEA-TX: BLUETOOTH_BROADCAST.3 DUAL_OUTPUT.1 SERIAL1_CONNECTION.3
NMEA-TX1: BLUETOOTH_BROADCAST1.3 DUAL_OUTPUT1.1 SERIAL1_CONNECTION1.3
NMEA-TX2: BLUETOOTH_BROADCAST2.3 DUAL_OUTPUT2.1 SERIAL1_CONNECTION2.3
PPS: R2.P1 U3.53
PPS1: R40.P1 U8.53
PPS2: R70.P1 U16.53
PROG1: R7.2 U10.6
PROG2: R43.2 U13.6
PROG3: R73.2 U20.6
RTK_LV: R4.P7 U3.20
RTK_LV1: R53.P7 U8.20
RTK_LV2: R83.P7 U16.20
RX2_LV: R4.P6 U3.26
RX2_LV1: R53.P6 U8.26
RX2_LV2: R83.P6 U16.26
RXLV: R9.P4 U3.43
RXLV1: R39.P4 U8.43
RXLV2: R69.P4 U16.43
SCL_LV: R9.P2 U3.45
SCL_LV1: R39.P2 U8.45
SCL_LV2: R69.P2 U16.45
SDA_LV: R9.P3 U3.44
SDA_LV1: R39.P3 U8.44
SDA_LV2: R69.P3 U16.44
TX2_LV: R4.P5 U3.27
TX2_LV1: R53.P5 U8.27
TX2_LV2: R83.P5 U16.27
TXLV: R3.1 U3.42
TXLV1: R41.1 U8.42
TXLV2: R71.1 U16.42
UNP_D+: D6.3 J5.A6 J5.B6
UNP_D+1: D16.3 J20.A6 J20.B6
UNP_D+2: D29.3 J38.A6 J38.B6
UNP_D-: D6.1 J5.A7 J5.B7
UNP_D-1: D16.1 J20.A7 J20.B7
UNP_D-2: D29.1 J38.A7 J38.B7
V_BATT [power]: C8.1 C15.1 C17.1 D7.A J10.1 MEAS1.2 MEAS1.4 U4.1 U4.3 U7.2 U7.3 U10.9 U10.10
V_BATT1 [power]: C24.1 C32.1 C33.1 D18.A J23.1 MEAS3.2 MEAS3.4 U11.2 U11.3 U12.1 U12.3 U13.9 U13.10
V_BATT2 [power]: C41.1 C49.1 C50.1 D31.A J41.1 MEAS5.2 MEAS5.4 U18.2 U18.3 U19.1 U19.3 U20.9 U20.10
VIN [power]: C9.1 D2.5 D6.5 D7.C D9.C D13.6 J7.2 MEAS.2 MEAS.4 U10.1 U10.2
VIN1 [power]: C25.1 D16.5 D18.C D23.C D24.5 D25.6 J21.2 MEAS2.2 MEAS2.4 U13.1 U13.2
VIN2 [power]: C42.1 D29.5 D31.C D36.C D37.5 D38.6 J39.2 MEAS4.2 MEAS4.4 U20.1 U20.2
ZED-RXI1: J15.2 R9.P5 SERIAL1_CONNECTION.5
ZED-RXI2: BLUETOOTH_BROADCAST.4 J9.3 J11.2 R4.P3
ZED-RXI3: BLUETOOTH_BROADCAST1.4 J26.3 J28.2 R53.P3
ZED-RXI4: J31.2 R39.P5 SERIAL1_CONNECTION1.5
ZED-RXI5: BLUETOOTH_BROADCAST2.4 J44.3 J46.2 R83.P3
ZED-RXI6: J49.2 R69.P5 SERIAL1_CONNECTION2.5
ZED-TXO1: J15.1 R3.2 SERIAL1_CONNECTION.2
ZED-TXO2: BLUETOOTH_BROADCAST.1 J9.2 J11.3 R4.P4
ZED-TXO3: J31.1 R41.2 SERIAL1_CONNECTION1.2
ZED-TXO4: BLUETOOTH_BROADCAST1.1 J26.2 J28.3 R53.P4
ZED-TXO5: J49.1 R71.2 SERIAL1_CONNECTION2.2
ZED-TXO6: BLUETOOTH_BROADCAST2.1 J44.2 J46.3 R83.P4
ZED_!SAFE!: J18.3 R2.P6
ZED_!SAFE!1: J35.3 R40.P6
ZED_!SAFE!2: J53.3 R70.P6
ZED_!SAFE!_LV: R2.P3 U3.50
ZED_!SAFE!_LV1: R40.P3 U8.50
ZED_!SAFE!_LV2: R70.P3 U16.50
ZED_D_SEL: J18.5 R2.P7
ZED_D_SEL1: J35.5 R40.P7
ZED_D_SEL2: J53.5 R70.P7
ZED_D_SEL_LV: R2.P2 U3.47
ZED_D_SEL_LV1: R40.P2 U8.47
ZED_D_SEL_LV2: R70.P2 U16.47
ZED_FENCE_STAT: J1.2 R4.P1
ZED_FENCE_STAT1: J30.2 R53.P1
ZED_FENCE_STAT2: J48.2 R83.P1
ZED_PPS_STAT: J18.4 R2.P8 R11.2 ZED_CONTROL.1
ZED_PPS_STAT1: J35.4 R19.2 R40.P8 ZED_CONTROL1.1
ZED_PPS_STAT2: J53.4 R61.2 R70.P8 ZED_CONTROL2.1
ZED_RTK_STAT: D3.C J1.3 R4.P2
ZED_RTK_STAT1: D15.C J30.3 R53.P2
ZED_RTK_STAT2: D28.C J48.3 R83.P2

## Tracks (layer width: path | path; a pad name or v marks a point on that pad's centre or on a via)
3.3V  (via drill 0.3)
  Top 0.305: J13.2 11.55,81.08 13.72,83.25 v25.78,83.25
  Top 0.559: U2.5 46.2,50.55 C2.1 C4.1 42.67,50.65 | 42.67,50.65 42.29,50.65 | 42.29,50.65 41.66,50.65 | 41.66,50.65 C5.2 R15.2 37.5,50.65 37.17,50.31 U3.38 | 42.29,50.65 42.29,52.77 42.6,53.08 43.14,53.62 C7.2 44.58,54.04 | U3.34 41.57,50.56 41.66,50.65 | U3.33 42.67,50.64 42.67,50.65 | v44.83,54.04 44.58,54.04 | J1.4 60.83,45.15 62.06,43.91 62.06,36.71 60.07,34.72 J12.4 | R12.2 47.46,62.08 46.86,62.67 45.47,62.67 44.58,61.78 44.58,54.04 | J12.4 60.07,22.14 62.01,20.21 J2.1 62.01,16.59 v61.98,16.55 | C16.1 J12.4
  Route2 0.559: v25.78,90.1 44.45,90.1 v44.58,89.98 58.8,89.98 v59.05,90.23 | J17.2 42.29,24.83 42.29,17.08 v41.84,16.63
  Route15 0.559: v44.83,54.04 44.83,89.72 v44.58,89.98 | J1.4 61.98,47.05 61.98,53.4 v61.34,54.04
  Bottom 0.305: v25.78,83.25 v25.78,90.1
  Bottom 0.559: 51.18,113.81 52.7,113.81 | C13.1 52.7,113.81 | C11.1 51.18,113.81 | C14.1 C10.1 24.93,106.74 | 24.93,106.74 24.93,104.67 25.78,103.82 25.78,102.93 | U6.16 24.93,106.74 | v25.78,90.1 25.78,102.93 | U6.4 25.78,102.93 | v61.34,54.04 60.8,54.04 60.4,53.63 59.74,53.63 59.34,54.04 v44.83,54.04 | 52.7,113.81 56.82,113.81 59.02,111.61 59.02,106.74 | 59.02,106.74 R13.2 59.02,90.27 v59.05,90.23 | J4.2 41.52,16.94 v41.84,16.63 41.91,16.55 61.47,16.55 | 61.47,16.55 v61.98,16.55 | J16.VCC 61.54,16.63 61.47,16.55 | 59.02,106.74 58.96,106.69 52.51,106.69 52.2,107.01 R20.2 | U1.2 51.13,113.76 51.18,113.81
3.3V1  (via drill 0.3)
  Top 0.305: J36.2 80.26,81.08 82.42,83.25 v94.49,83.25